# Altium PCB NaiS802HD_0.7.PcbDoc (part 1 of 2)
Units mm, origin at the board's own origin, x right, y up, seen from the top; angles counter-clockwise.
Board outline 60 x 38 mm, 4 copper layers (Top, INT1, GND, Bottom), stack 0.965 mm thick; 181 components, 228 nets, 826 pads, 387 vias.
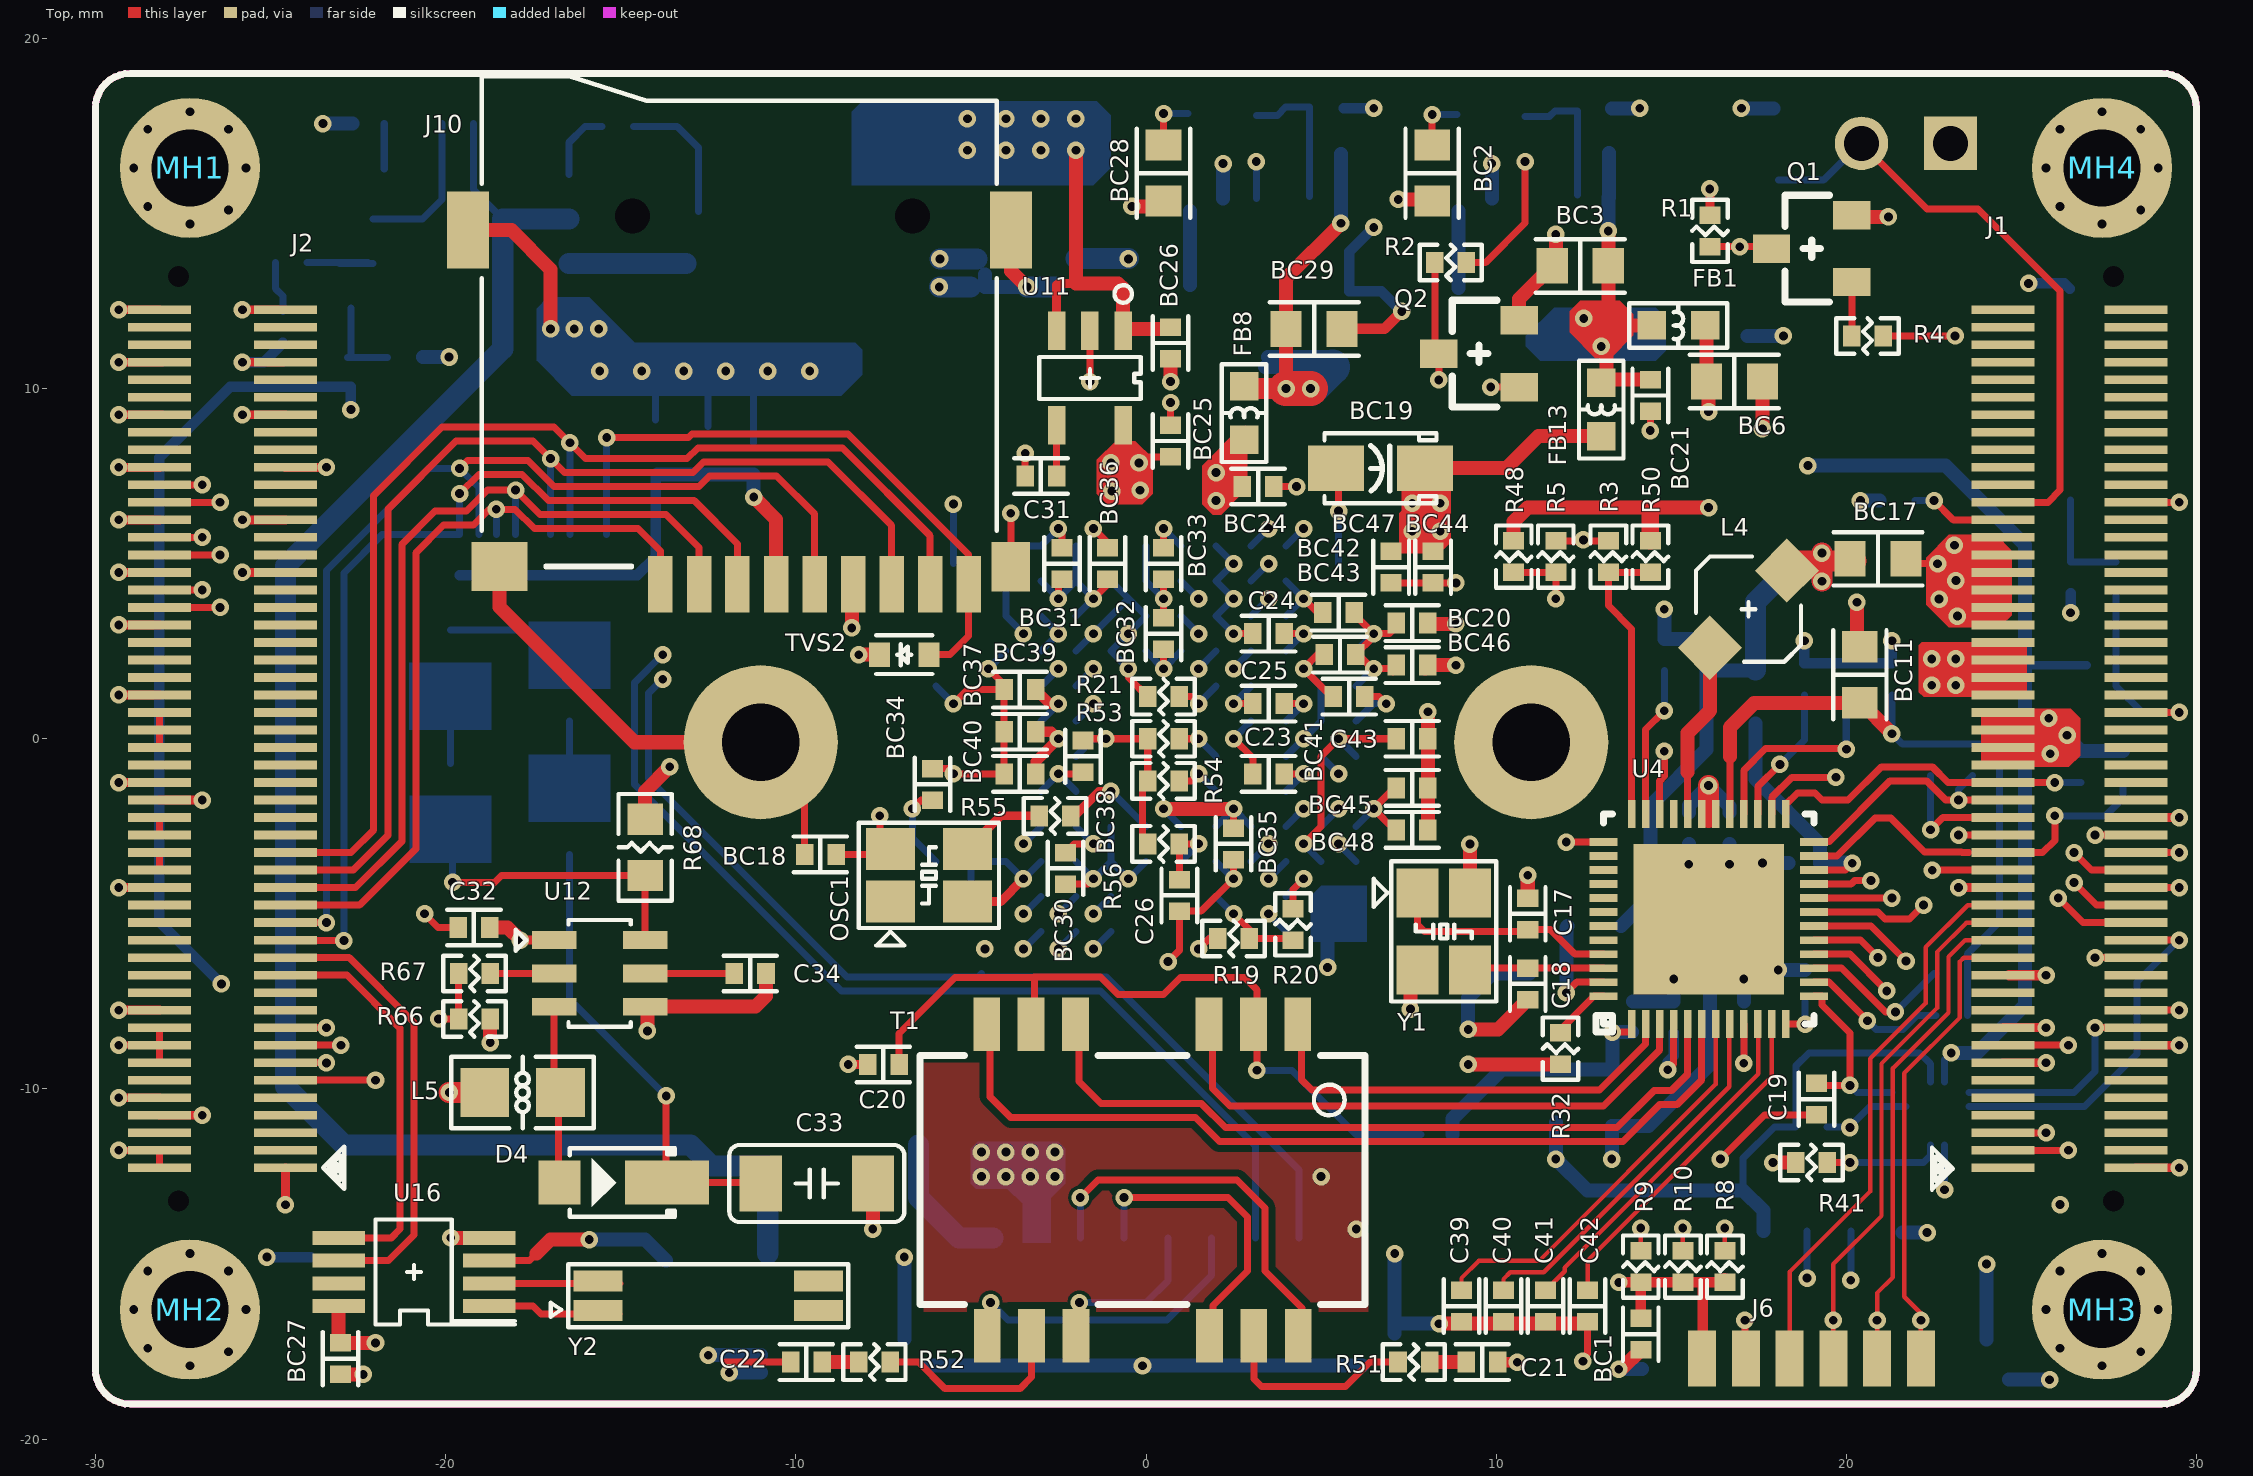
[diagram p0: Top view]
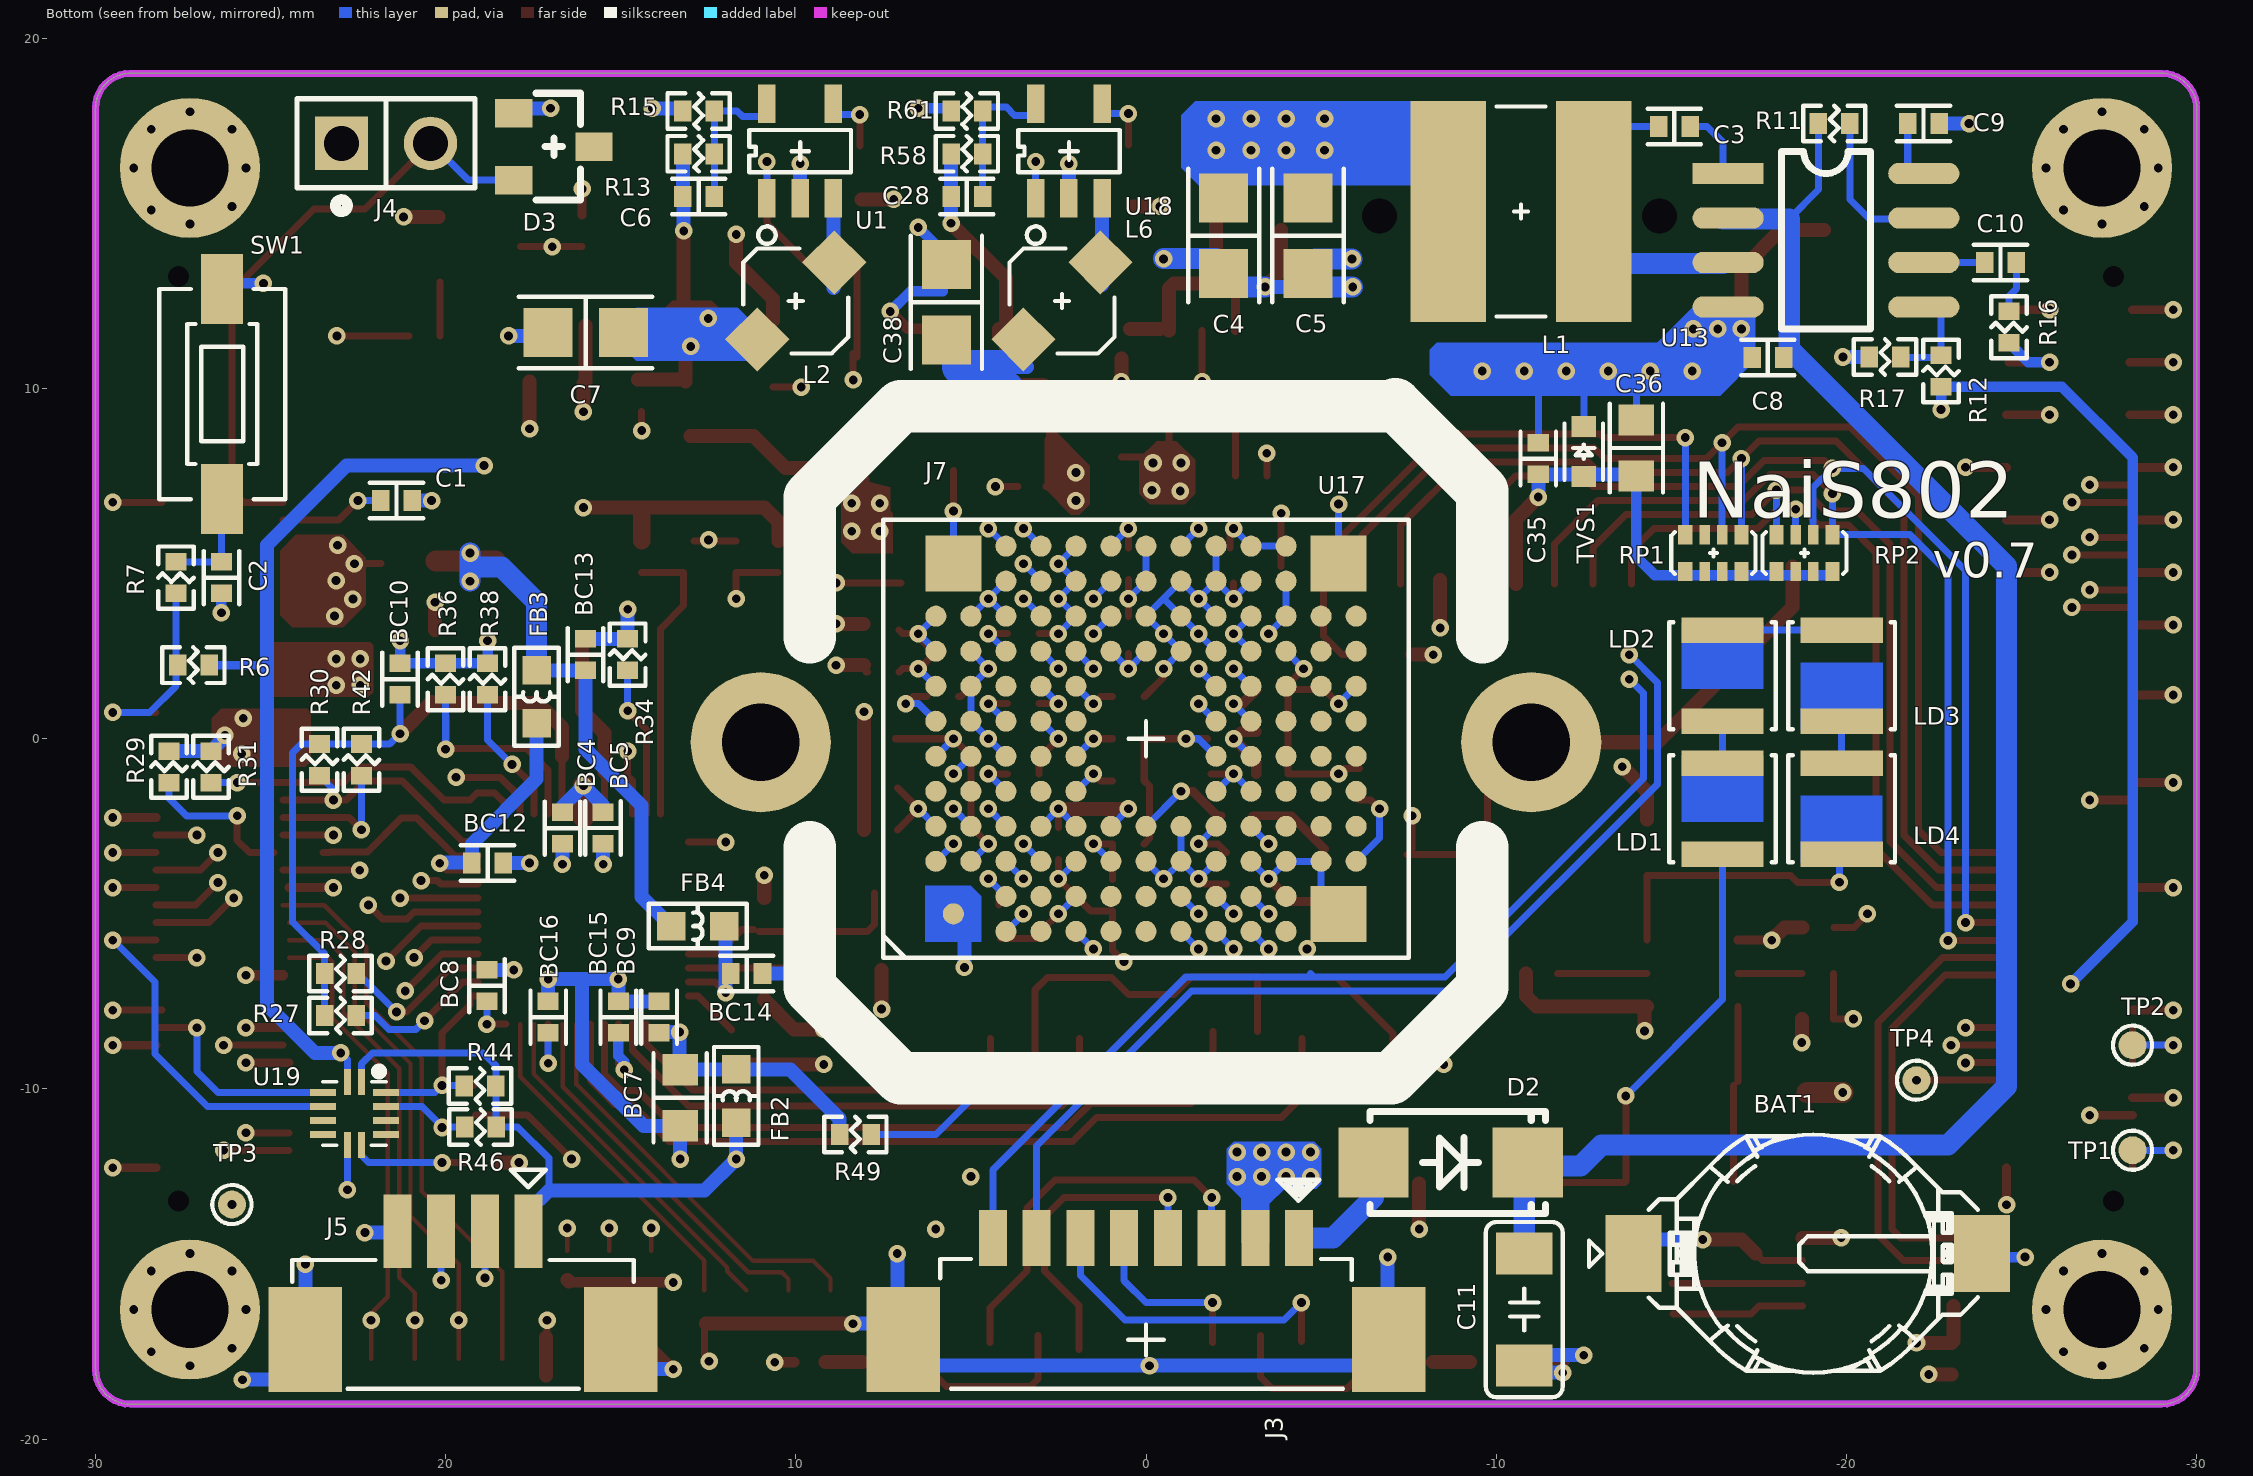
[diagram p1: Bottom view, seen from below]
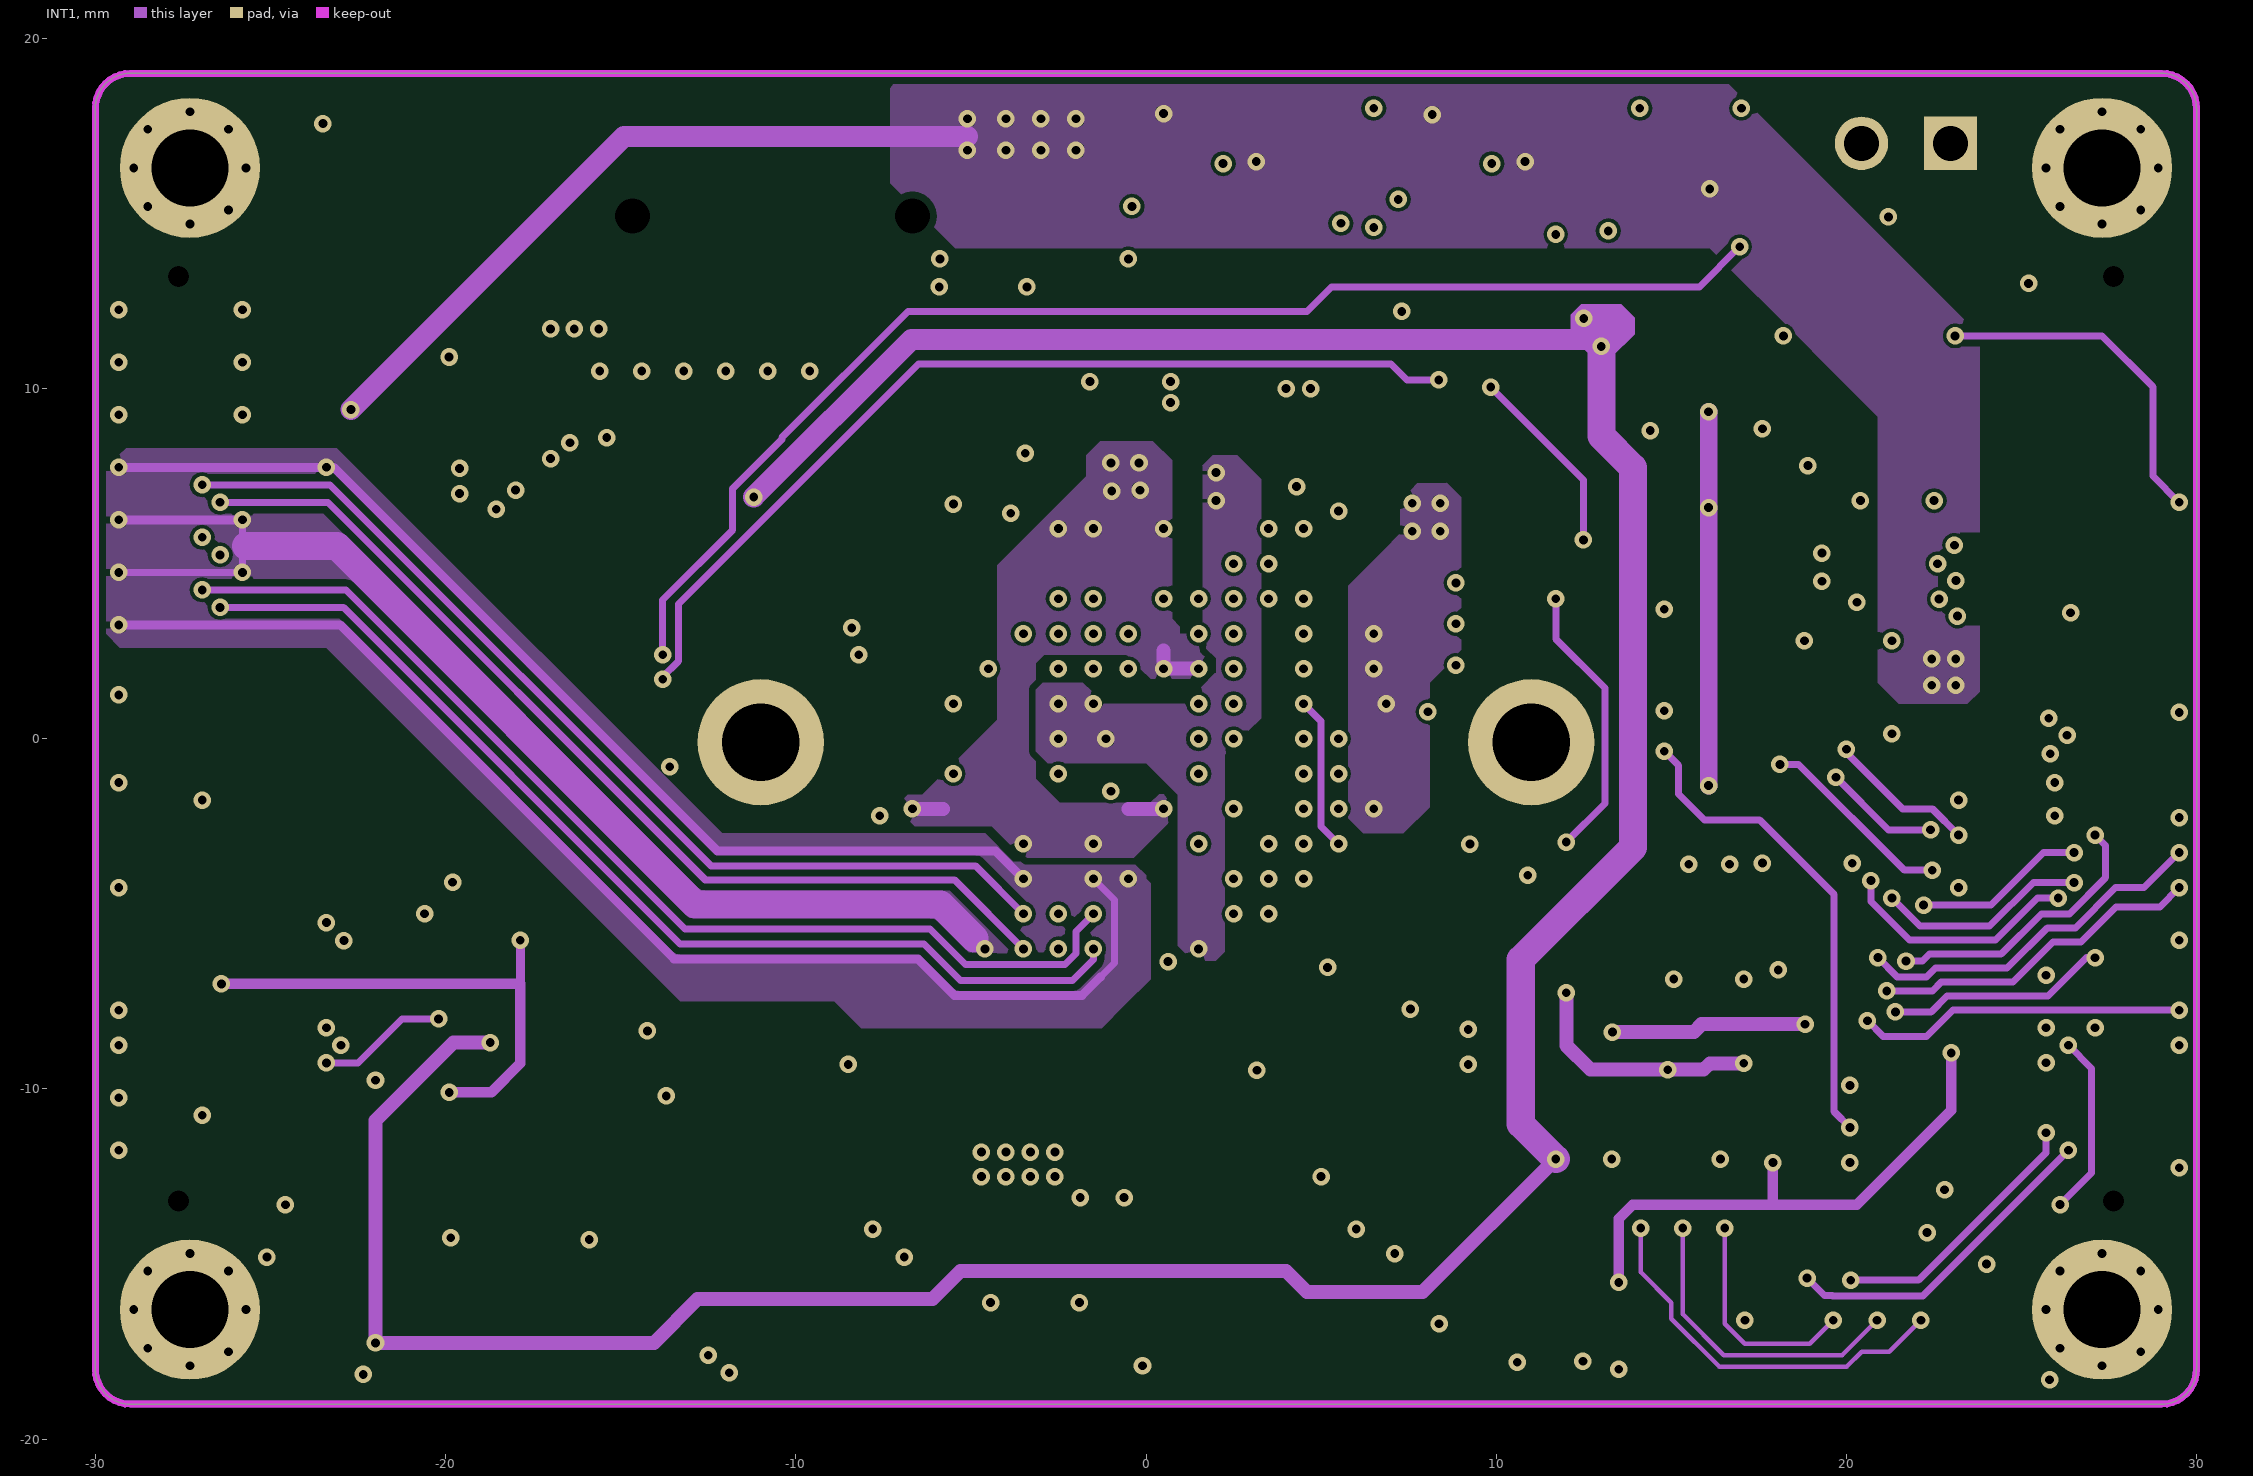
[diagram p2: INT1]
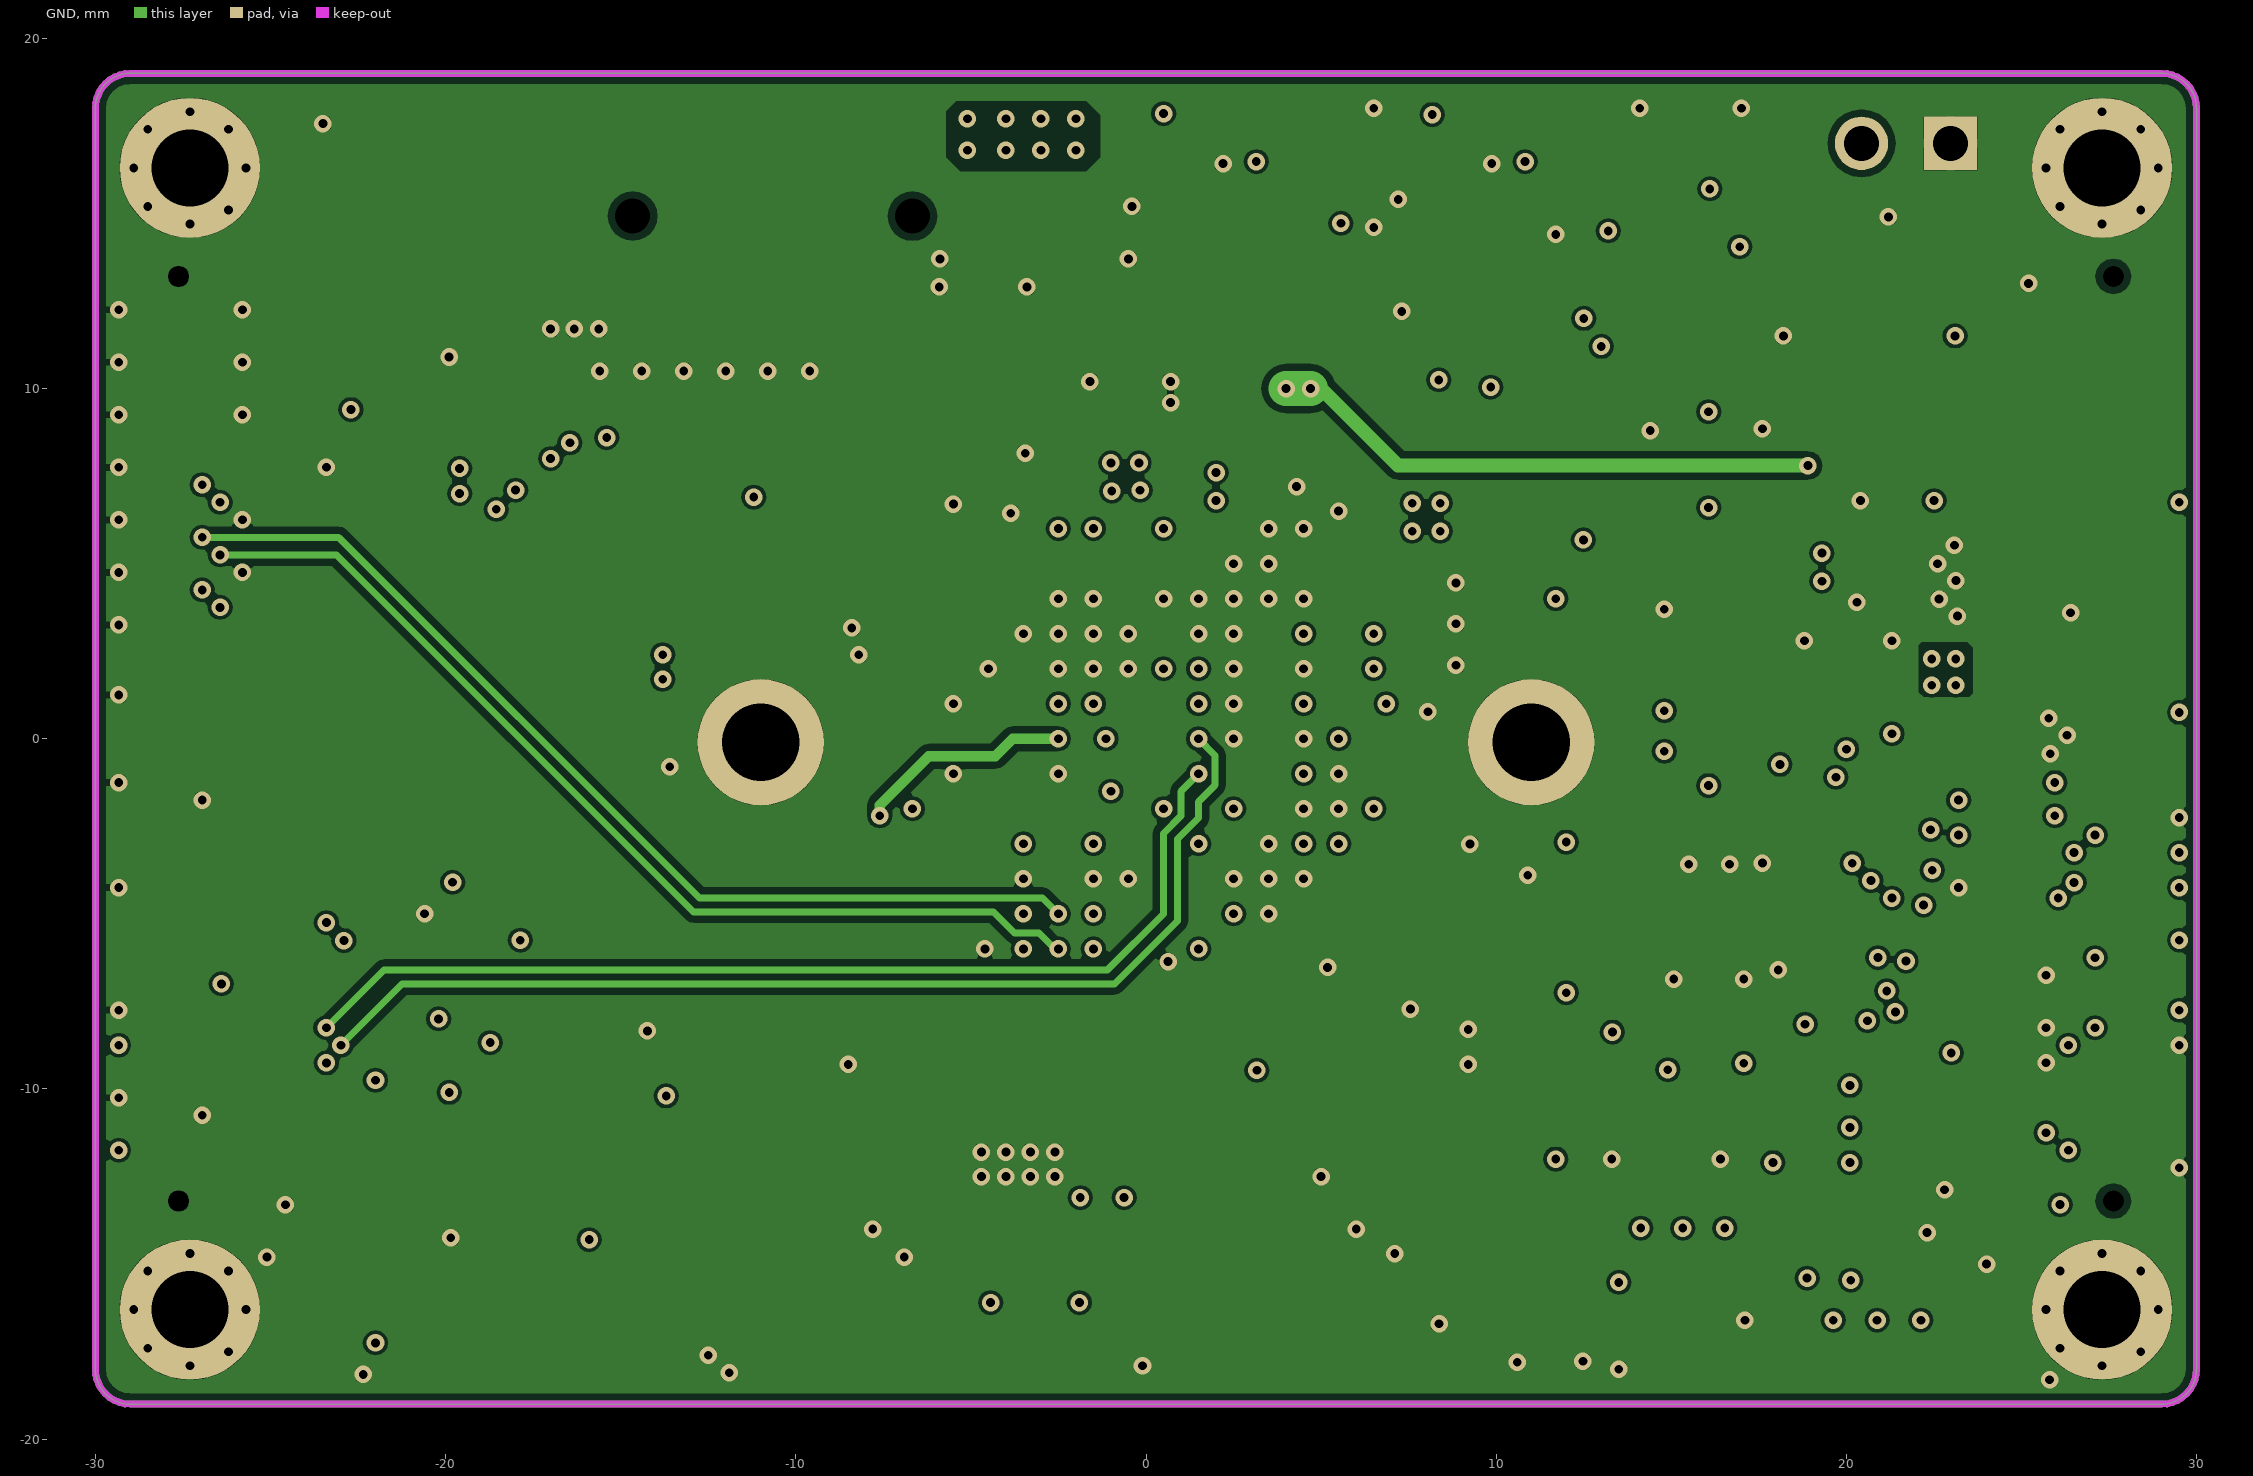
[diagram p3: GND]

## Layer stack, top to bottom
Solder Mask Top: solder mask 0.0102, Solder Resist, Dk 3.5
Top: signal copper 0.0343
Dielectric 1: dielectric 0.254, FR-4, Dk 4.3
INT1: signal copper 0.0343
Dielectric2: dielectric 0.254, FR-4, Dk 4.3
GND: signal copper 0.0343
Dielectric4: dielectric 0.32, FR-4, Dk 4.8
Bottom: signal copper 0.0343
Solder Mask Bottom: solder mask 0.0102, Solder Resist, Dk 3.5

## Board outline
-30,-18 -30,18 cw(c-29,18) -29,19 28.994,19 cw(c28.994,18) 29.994,18 30,18 30,-18 29.994,-18 cw(c28.994,-18) 28.994,-19 -29,-19 cw(c-29,-18)

## Design rules (kind name [scope] priority, off if disabled: settings)
AssemblyTestPointUsage [All] p1 off:
AssemblyTestpoint [All] p1 off: testpointundercomponent=TRUE minsize=1.016 maxsize=2.54 preferedsize=1.524 minholesize=0 maxholesize=1.016 preferedholesize=0.813 testpointgrid=0.025 usegrid=TRUE gridtolerance=0 allowsidetop=TRUE allowsidebottom=TRUE
Clearance Clearance_6 [InNet('+12V') or InNet('N21617464') or InNet('+5.0V')  or InNet('+3.3V') vs IsFill] p1: gap=0.4 ignorepadtopadclearanceinfootprint=FALSE except(0: Arc-Hole Track-Hole SMDPad-Hole THPad-Hole Via-Hole Fill-Hole Poly-Hole Region-Hole Text-Hole)
Clearance Clearance_4 [InComponent('MH1') OR InComponent('MH2') OR InComponent('MH3') OR InComponent('MH4') or INnet('GND') vs OnLayer('Keep-Out Layer')] p2: gap=0 ignorepadtopadclearanceinfootprint=FALSE
Clearance Clearance_3 [InComponent('U4') or InComponent('RP1') or InComponent('RP2') or  HasFootprint('CS-0603')] p3: gap=0.127 ignorepadtopadclearanceinfootprint=FALSE except(0: Arc-Hole Track-Hole SMDPad-Hole THPad-Hole Via-Hole Fill-Hole Poly-Hole Region-Hole Text-Hole)
Clearance Clearance_2 [OnLayer('Keep-Out Layer') vs InNet('GND')] p4: gap=0.1 ignorepadtopadclearanceinfootprint=FALSE except(0: Arc-Hole Track-Hole SMDPad-Hole THPad-Hole Via-Hole Fill-Hole Poly-Hole Region-Hole Text-Hole)
Clearance Clearance_1 [IsVia] p5: gap=0.1 ignorepadtopadclearanceinfootprint=FALSE except(0: Arc-Hole Track-Hole SMDPad-Hole THPad-Hole Via-Hole Fill-Hole Poly-Hole Region-Hole Text-Hole)
Clearance [All] p6: gap=0.2 ignorepadtopadclearanceinfootprint=FALSE except(0: Arc-Hole Track-Hole SMDPad-Hole THPad-Hole Via-Hole Fill-Hole Poly-Hole Region-Hole Text-Hole)
ComponentClearance ComponentClearance_1 [InComponent('J7') or InComponent('J5') or InComponent('J3') or InComponent('U18') or InComponent('U1') or Incomponent('J10') vs InComponent('U19') or InComponent('D2')  or InComponent('L6') or InComponent('L2') or InComponent('LD1') or InComponent('LD2') or InComponent('LD3') or InComponent('LD4') or InComponent('FB11') or InComponent('BC14') or InComponent('U17') or InComponent('OSC1') or InComponent('U11')  or  InComponent('U8') or InComponent('BC25') or InComponent('C24') or InComponent('C31') or InComponent('BC18') or InComponent('R55') or InComponent('C27') or InComponent('BC20') or InComponent('FB12') or InComponent('C25') or InComponent('C26') or InComponent('R56') or InComponent('R20') or InComponent('R19') or InComponent('R53') or InComponent('R54') or InComponent('R21') or InComponent('R18') or InComponent('FB4')  or Incomponent('C35') or Incomponent('TVS1') or InComponent('C36') or InComponent('FB2') or InComponent('BC7')] p1: gap=-10 collisioncheckmode=3 verticalgap=0.254 showdistances=FALSE
ComponentClearance [All] p2: gap=0.01 collisioncheckmode=3 verticalgap=0 showdistances=FALSE
DiffPairsRouting [All] p1 off: maxlimit=0.254 minlimit=0.2 mostfreqgap=0.254 toplayer_prefgap=0.2 toplayer_minwidth=0.2 toplayer_maxwidth=0.381 toplayer_prefwidth=0.254 midlayer1_mingap=0.254 midlayer1_minwidth=0.381 midlayer1_maxwidth=0.381 midlayer1_prefwidth=0.381 midlayer2_mingap=0.254 midlayer2_minwidth=0.381 midlayer2_maxwidth=0.381 midlayer2_prefwidth=0.381 bottomlayer_prefgap=0.2 bottomlayer_minwidth=0.2 bottomlayer_maxwidth=0.381 bottomlayer_prefwidth=0.254 maxuncoupledlength=12.7
FabricationTestPointUsage [All] p1 off: valid=0 allowmultiple=FALSE
FabricationTestpoint [All] p1 off: side=3 testpointundercomponent=TRUE minsize=1.016 maxsize=2.54 preferedsize=1.524 minholesize=0 maxholesize=1.016 preferedholesize=0.813 testpointgrid=0.025 allowsidetop=TRUE allowsidebottom=TRUE usegrid=TRUE gridtolerance=0
FanoutControl Fanout_BGA [IsBGA] p1 off: bgadir=Out bgaviamode=Centered fanoutstyle=Auto fanoutdirection=Alternating viagrid=0.025 // Fanout_BGA (Default Rule)
FanoutControl Fanout_SOIC [IsSOIC] p3 off: bgadir=Out bgaviamode=Centered fanoutstyle=Auto fanoutdirection=Alternating viagrid=0.025 // Fanout_SOIC (Default Rule)
FanoutControl Fanout_Small [(CompPinCount < 5)] p4 off: bgadir=Out bgaviamode=Centered fanoutstyle=Auto fanoutdirection=OutThenIn viagrid=0.025 // Fanout_Small (Default Rule)
FanoutControl Fanout_Default [All] p5 off: bgadir=Out bgaviamode=Centered fanoutstyle=Auto fanoutdirection=Alternating viagrid=0.025 // Fanout_Default (Default Rule)
Height [All] p1 off: minheight=0 maxheight=25.4 prefheight=12.7
HoleSize [All] p1: absolutevalues=TRUE maxlimit=5 minlimit=0.25 maxpercent=80.000 minpercent=20.000
HoleToHoleClearance [All] p1: gap=0.2 allowstackedmicrovias=TRUE
MinimumSolderMaskSliver [All] p1: minsoldermaskwidth=0
PasteMaskExpansion [All] p1 off: expansion=0
PermittedLayers [All] p1 off: toplayerpermitted=TRUE bottomlayerpermitted=TRUE
PlaneClearance [InNet('GND')] p1 off: clearance=0.508
PlaneConnect [All] p1 off: planeconnectstyle=Direct reliefexpansion=0.508 reliefentries=4 reliefconductorwidth=0.254 reliefairgap=0.254
PolygonConnect [All] p1 off: connectstyle=Direct reliefconductorwidth=0.254 reliefentries=4 polygonreliefangle="90 Angle" airgapwidth=0.1
RoutingVias [All] p1: holewidth=0.25 width=0.5 viastyle="Through Hole" minholewidth=0.25 minwidth=0.5 maxholewidth=0.25 maxwidth=0.5
ShortCircuit [All] p1 off: allowed=FALSE
SilkToSilkClearance [All] p1: silktosilkclearance=0
SilkToSolderMaskClearance [IsPad] p1: minsilkscreentomaskgap=0 clearancetoexposedcopper=TRUE
SolderMaskExpansion [All] p1: expansion=0.102
Width Width_1 [(InNet('VDD_3.3V') OR InNet('AVDD') OR InNet('OVDD') OR InNet('DVDD'))] p1: maxlimit=2 minlimit=0.2 preferedwidth=2
Width [All] p2: maxlimit=1 minlimit=0.1 preferedwidth=0.2
10 further rules are at their usual default settings.

## Components (designator, comment, footprint, x,y, rotation, side; value= is the part's Value field where it differs from the comment)
BAT1 "CN048S-0005//SMD_BAT_HOLDER" BAT-CN048S -18.9,-14.7 r90 bottom
BC1 "0.1uF" CS-1005 14.127,-17 r270 top
BC2 "0.1uF" CS-1608 8.173,16.15 r90 top
BC3 "1uF" CS-1608 12.4,13.5 r0 top
BC4 "0.1uF" CS-1005 16.663,-2.553 r270 bottom
BC5 "0.1uF" CS-1005 15.5,-2.549 r270 bottom
BC6 "10uF" CS-1608 16.8,10.2 r0 top
BC7 "10uF" CS-1608 13.3,-10.25 r270 bottom
BC8 "0.1uF" CS-1005 18.818,-7.049 r90 bottom
BC9 "0.1uF" CS-1005 13.9,-7.949 r90 bottom
BC10 "0.1uF" CS-1005 21.3,1.7 r90 bottom
BC11 "10uF" CS-1608 20.381,1.827 r90 top
BC12 "0.1uF" CS-1005 18.8,-3.549 r180 bottom
BC13 "0.1uF" CS-1005 16,2.4 r90 bottom
BC14 "0.1uF" CS-1005 11.4,-6.7 r180 bottom
BC15 "0.1uF" CS-1005 15.068,-7.949 r90 bottom
BC16 "0.1uF" CS-1005 17.068,-7.949 r90 bottom
BC17 "10uF" CS-1608 20.9,5.137 r0 top
BC18 "1uF" CS-1005 -9.3,-3.3 r0 top
BC19 "22uF" CTS-3216 6.696,7.727 r180 top
BC20 "1uF" CS-1005 7.6,3.3 r180 top
BC21 "0.1uF" CS-1005 14.4,9.8 r90 top
BC24 "1uF" CS-1005 3.2,7.2 r180 top
BC25 "1uF" CS-1005 0.7,8.5 r270 top
BC26 "0.1uF" CS-1005 0.7,11.3 r90 top
BC27 "0.1uF" CS-1005 -23,-17.7 r90 top
BC28 "0.1uF" CS-1608 0.5,16.15 r90 top
BC29 "1uF" CS-1608 4.8,11.7 r180 top
BC30 "1uF" CS-1005 -2.3,-3.7 r90 top
BC31 "1uF" CS-1005 -2.4,5 r90 top
BC32 "1uF" CS-1005 0.5,3 r270 top
BC33 "1uF" CS-1005 0.5,5 r90 top
BC34 "1uF" CS-1005 -6.1,-1.3 r270 top
BC35 "1uF" CS-1005 2.5,-3 r90 top
BC36 "1uF" CS-1005 -1.1,5 r90 top
BC37 "1uF" CS-1005 -3.6,0.2 r0 top
BC38 "1uF" CS-1005 -1.8,-0.5 r90 top
BC39 "1uF" CS-1005 -3.6,1.4 r0 top
BC40 "1uF" CS-1005 -3.6,-1 r0 top
BC41 "1uF" CS-1005 5.8,1.2 r0 top
BC42 "0.1uF" CS-1005 5.5,3.6 r0 top
BC43 "10uF" CS-1005 5.538,2.4 r0 top
BC44 "0.1uF" CS-1005 8.2,4.9 r90 top
BC45 "10uF" CS-1005 7.6,-1.4 r180 top
BC46 "0.1uF" CS-1005 7.6,2.1 r180 top
BC47 "10uF" CS-1005 7,4.9 r90 top
BC48 "0.1uF" CS-1005 7.6,-2.6 r180 top
C1 "0.1uF" CS-1005 21.4,6.8 r0 bottom
C2 "1nF/NI" CS-1005 26.4,4.6 r270 bottom
C3 "10nF" CS-1005 -15.085,17.485 r0 bottom
C4 "22uF-6.3V" CS-2012 -2.219,14.365 r270 bottom
C5 "22uF-6.3V" CS-2012 -4.625,14.365 r270 bottom
C6 "22pF" CS-1005 12.773,15.483 r180 bottom
C7 "22uF-6.3V" CS-2012 16,11.6 r0 bottom
C8 "0.1uF" CS-1005 -17.756,10.889 r0 bottom
C9 "0.1uF" CS-1005 -22.2,17.564 r180 bottom
C10 "3.3nF" CS-1005 -24.4,13.6 r180 bottom
C11 "4.7uF-25V-3216" C3216 -10.8,-16.3 r270 bottom (schematic designator c11)
C17 "12pF" CS-1005 10.9,-5 r270 top
C18 "12pF" CS-1005 10.9,-7 r90 top
C19 "0.1uF" CS-1005 19.143,-10.292 r270 top
C20 "0.1uF" CS-1005 -7.5,-9.3 r180 top
C21 "0.1uF" CS-1005 9.6,-17.8 r0 top
C22 "0.1uF" CS-1005 -9.7,-17.8 r180 top
C23 "1uF" CS-1005 3.5,-1 r0 top
C24 "220nF" CS-1005 3.5,3 r0 top
C25 "1uF" CS-1005 3.5,1 r0 top
C26 "0.1uF" CS-1005 0.95,-4.473 r270 top
C28 "22pF" CS-1005 5.116,15.483 r180 bottom
C31 "10nF" CS-1005 -3,7.5 r0 top
C32 "1uF" CS-1005 -19.19,-5.387 r180 top
C33 "4.7uF-25V-3216" C3216 -9.4,-12.7 r0 top
C34 "220nF" CS-1005 -11.3,-6.7 r180 top
C35 "0.1uF" CS-1005 -11.2,8 r90 bottom
C36 "22uF" CS-1608 -14,8.3 r90 bottom
C38 "22uF-6.3V" CS-2012 5.7,12.462 r90 bottom
C39 "0.1uF" CS-1005 9.008,-16.2 r270 top
C40 "0.1uF" CS-1005 10.208,-16.2 r270 top
C41 "0.1uF" CS-1005 11.408,-16.2 r270 top
C42 "0.1uF" CS-1005 12.608,-16.2 r270 top
C43 "1uF" CS-1005 7.6,0 r180 top
D2 "RB051L-40" SOD-106 -8.7,-12.1 r180 bottom
D3 "BAT54A" SOT-23 16.9,16.9 r180 bottom
D4 "DFLS140" PowerDI123 -14.9,-12.672 r180 top
FB1 "220R" LS-1608 15.2,11.8 r0 top
FB2 "220R" LS-1608 11.7,-10.2 r90 bottom
FB3 "220R" LS-1608 17.4,1.2 r270 bottom
FB4 "220R" LS-1608 12.8,-5.349 r180 bottom
FB8 "220R" LS-1608 2.8,9.3 r90 top
FB13 "220R" LS-1608 13,9.4 r270 top
J1 "LB222-G100S-BOR" BTB2X50-050-F-SMD 26.37,0 r180 top locked
J2 "LB208-G100P-BOR" BTB2X50-050-M-SMD -26.37,0 r180 top locked
J3 "12505WR-08" 12505WR-8P 0,-15.708 r180 bottom
J4 "PH-2PSM//NI" PH-2PSM 21.7,17 r90 bottom
J5 "12505WR-4P" 12505WS-4P 19.5,-15.608 r180 bottom
J6 "6pin 2.54mm//NI" TP_HEADER_6 19,-17.7 r0 top
J7 "Lens Holder" LENS_HOLDER_B_SMALL 0,-0.1 r0 bottom locked
J10 "112J-TXAR-R" CON_U-SD -13.866,4.412 r0 top locked
L1 "CDRH5D18NP-100NC-10uH" CDRH5D18NP -10.708,15.055 r180 bottom
L2 "CDRH2D14NP-2R2NC" CDRH2D14NP 10,12.5 r180 bottom
L4 "CDRH2D14NP-2R2NC" CDRH2D14NP 17.2,3.7 r0 top
L5 "10uH" LS-2012 -17.8,-10.1 r180 top
L6 "CDRH2D14NP-2R2NC" CDRH2D14NP 2.4,12.5 r180 bottom
LD1 "LED3030" LED-3030 -16.461,-2 r90 bottom
LD2 "LED3030" LED-3030 -16.461,1.8 r90 bottom
LD3 "LED3030" LED-3030 -19.861,1.8 r270 bottom
LD4 "LED3030" LED-3030 -19.861,-2 r270 bottom
MH1 "4.04pi" VA-2.2 -27.3,16.3 r0 top locked
MH2 "4.04pi" VA-2.2 -27.3,-16.3 r0 top locked
MH3 "4.04pi" VA-2.2 27.3,-16.3 r0 top locked
MH4 "4.04pi" VA-2.2 27.3,16.3 r0 top locked
OSC1 "24Mhz-SX32-1.8V" SX-32 -6.2,-3.9 r180 top
Q1 "MMBT6427" SOT-23 19,14 r180 top
Q2 "MMBT6427" SOT-23 9.5,11 r180 top
R1 "2.2K" RS-1005 16.1,14.5 r90 top
R2 "2.2K" RS-1005 8.7,13.6 r0 top
R3 "10K" RS-1005 13.2,5.2 r270 top
R4 "10K" RS-1005 20.6,11.5 r0 top
R5 "10K" RS-1005 11.7,5.2 r270 top
R6 "10K" RS-1005 27.2,2.1 r180 bottom
R7 "0" RS-1005 27.7,4.6 r90 bottom
R8 "4.7K" RS-1005 16.527,-15.073 r270 top
R9 "4.7K" RS-1005 14.127,-15.073 r270 top
R10 "4.7K" RS-1005 15.327,-15.073 r270 top
R11 "100K" RS-1005 -19.65,17.564 r180 bottom
R12 "45K, 1%" RS-1005 -22.7,10.5 r90 bottom
R13 "150K, 1%" RS-1005 12.773,16.703 r0 bottom
R15 "33.3K, 1%" RS-1005 12.773,17.923 r180 bottom
R16 "2.2K" RS-1005 -24.645,11.75 r90 bottom
R17 "10K, 1%" RS-1005 -21.1,10.9 r180 bottom
R19 "10K" RS-1005 2.5,-5.7 r0 top
R20 "0//NI" RS-1005 4.2,-5.3 r270 top
R21 "0" RS-1005 0.5,1.2 r0 top
R27 "4.7K" RS-1005 23,-7.9 r180 bottom
R28 "4.7K" RS-1005 23,-6.7 r180 bottom
R29 "4.7K" RS-1005 27.9,-0.8 r270 bottom
R30 "4.7K" RS-1005 23.6,-0.6 r270 bottom
R31 "4.7K" RS-1005 26.7,-0.8 r270 bottom
R32 "2.49K, 1%" RS-1005 11.836,-8.849 r90 top
R34 "4.7K" RS-1005 14.8,2.4 r270 bottom
R36 "4.7K" RS-1005 20,1.7 r270 bottom
R38 "4.7K" RS-1005 18.8,1.7 r270 bottom
R41 "2.2K" RS-1005 19,-12.1 r180 top
R42 "4.7K" RS-1005 22.4,-0.6 r90 bottom
R44 "40.2K" RS-1005 19.016,-9.911 r0 bottom
R46 "10K" RS-1005 19,-11.084 r180 bottom
R48 "4.7K" RS-1005 10.5,5.2 r270 top
R49 "0//NI" RS-1005 8.3,-11.3 r180 bottom
R50 "4.7K" RS-1005 14.4,5.2 r90 top
R51 "75" RS-1005 7.645,-17.8 r180 top
R52 "75" RS-1005 -7.755,-17.8 r0 top
R53 "4.7K" RS-1005 0.5,0 r0 top
R54 "4.7K" RS-1005 0.5,-1.2 r0 top
R55 "22" RS-1005 -2.6,-2.2 r0 top
R56 "10K" RS-1005 0.5,-3 r180 top
R58 "150K, 1%" RS-1005 5.116,16.703 r0 bottom
R61 "75K,1%" RS-1005 5.116,17.923 r180 bottom
R66 "10K" RS-1005 -19.175,-8 r0 top
R67 "22" RS-1005 -19.175,-6.7 r180 top
R68 "1, 1%" RS-1608 -14.3,-3.1 r90 top
RP1 "10K" RP-4_1005 -16.2,5.3 r180 bottom
RP2 "10K" RP-4_1005 -18.8,5.3 r180 bottom
SW1 "SW PB" SWS-CTT-1131U 26.378,9.843 r90 bottom
T1 "TRC41604NL" TRC41604NL -0.1,-12.6 r180 top
TP1 "TPS" TP_0.8_SMD -28.17,-11.75 r90 bottom
TP2 "TPS" TP_0.8_SMD -28.17,-8.75 r90 bottom
TP3 "TPS" TP_0.8_SMD 26.1,-13.3 r90 bottom
TP4 "TPS" TP_0.8_SMD -22,-9.75 r90 bottom
TVS1 "ESD5B5.0ST1G" SOD-523 -12.5,8.2 r270 bottom
TVS2 "ESD5B5.0ST1G" SOD-523 -6.9,2.4 r0 top
U1 "AME5253-AEVADJ" SOT-23-5P 9.873,16.78 r180 bottom
U4 "YT8521SH" QFN48_6x6 16.068,-5.149 r90 top
U11 "SGM2036-1.2YN5G/TR" SOT-23-5P -1.6,10.3 r180 top
U12 "TPS61165DBVR" SOT23-6 -15.6,-6.7 r90 top
U13 "MP1482" SOIC-8 -19.4,14.2 r270 bottom
U16 "DS1339U-33" TSSOP8-M -20.9,-15.225 r90 top
U17 "IMX385LQR-C" LGA-128_SONY 0,0 r90 bottom locked
U18 "AME5253-AEVADJ" SOT-23-5P 2.2,16.78 r180 bottom
U19 "SGM4574YUQN12G/TR" UTQFN-1.8】1.8-12L 22.6,-10.7 r270 bottom
Y1 "25MHz-S20P-SX32" SX-32 8.5,-5.5 r90 top
Y2 "32.768KHz-MC-146-7pF" XTS-MC-146 -12.5,-15.9 r0 top

## Footprints (in the part's own frame and the unit in brackets; to place one, negate y for a bottom-side part, rotate by r counter-clockwise, add the part's x,y. Pads: shape width x height; smd on the part's side, far side on the other; paste and mask are expansions set on the pad)
12505WR-8P [mm]
  rect 0.8x1.6 smd: 1(4.375,1.45) 2(3.125,1.45) 3(1.875,1.45) 4(0.625,1.45) 5(-0.625,1.45) 6(-1.875,1.45) 7(-3.125,1.45) 8(-4.375,1.45)
  rect 2.1x3 smd: 9(-6.925,-1.45) 10(6.925,-1.45)
  silkscreen extent -5.87,-2.85 5.87,3.12
12505WS-4P [mm]
  rect 0.8x2.1 smd: 1(1.875,1.55) 2(0.625,1.55) 3(-0.625,1.55) 4(-1.875,1.55)
  rect 2.1x3 smd: 5(-4.5,-1.55) 6(4.5,-1.55)
  silkscreen extent -4.87,-2.95 4.87,3.3
BAT-CN048S [mm]
  rect 2.2x1.6 smd: 1(0,4.975) 2(0,-4.975)
  silkscreen extent -3.4,-4.85 3.4,6.25, body extent -3.39,-5.22 3.31,5.18, height 2.8
BTB2X50-050-F-SMD [mm]
  rect 1.8x0.25 smd: 1(1.9,12.25) 2(-1.9,12.25) 3(1.9,11.75) 4(-1.9,11.75) 5(1.9,11.25) 6(-1.9,11.25) 7(1.9,10.75) 8(-1.9,10.75) 9(1.9,10.25) 10(-1.9,10.25) 11(1.9,9.75) 12(-1.9,9.75) 13(1.9,9.25) 14(-1.9,9.25) 15(1.9,8.75) 16(-1.9,8.75) 17(1.9,8.25) 18(-1.9,8.25) 19(1.9,7.75) 20(-1.9,7.75) 21(1.9,7.25) 22(-1.9,7.25) 23(1.9,6.75) 24(-1.9,6.75) 25(1.9,6.25) 26(-1.9,6.25) 27(1.9,5.75) 28(-1.9,5.75) 29(1.9,5.25) 30(-1.9,5.25) 31(1.9,4.75) 32(-1.9,4.75) 33(1.9,4.25) 34(-1.9,4.25) 35(1.9,3.75) 36(-1.9,3.75) 37(1.9,3.25) 38(-1.9,3.25) 39(1.9,2.75) 40(-1.9,2.75) 41(1.9,2.25) 42(-1.9,2.25) 43(1.9,1.75) 44(-1.9,1.75) 45(1.9,1.25) 46(-1.9,1.25) 47(1.9,0.75) 48(-1.9,0.75) 49(1.9,0.25) 50(-1.9,0.25) 51(1.9,-0.25) 52(-1.9,-0.25) 53(1.9,-0.75) 54(-1.9,-0.75) 55(1.9,-1.25) 56(-1.9,-1.25) 57(1.9,-1.75) 58(-1.9,-1.75) 59(1.9,-2.25) 60(-1.9,-2.25) 61(1.9,-2.75) 62(-1.9,-2.75) 63(1.9,-3.25) 64(-1.9,-3.25) 65(1.9,-3.75) 66(-1.9,-3.75) 67(1.9,-4.25) 68(-1.9,-4.25) 69(1.9,-4.75) 70(-1.9,-4.75) 71(1.9,-5.25) 72(-1.9,-5.25) 73(1.9,-5.75) 74(-1.9,-5.75) 75(1.9,-6.25) 76(-1.9,-6.25) 77(1.9,-6.75) 78(-1.9,-6.75) 79(1.9,-7.25) 80(-1.9,-7.25) 81(1.9,-7.75) 82(-1.9,-7.75) 83(1.9,-8.25) 84(-1.9,-8.25) 85(1.9,-8.75) 86(-1.9,-8.75) 87(1.9,-9.25) 88(-1.9,-9.25) 89(1.9,-9.75) 90(-1.9,-9.75) 91(1.9,-10.25) 92(-1.9,-10.25) 93(1.9,-10.75) 94(-1.9,-10.75) 95(1.9,-11.25) 96(-1.9,-11.25) 97(1.9,-11.75) 98(-1.9,-11.75) 99(1.9,-12.25) 100(-1.9,-12.25)
  round 0.5 hole 0.6: M1(-1.25,-13.2) M2(-1.25,13.2)
  silkscreen extent 3.32,11.67 3.92,12.87
BTB2X50-050-M-SMD [mm]
  rect 1.8x0.25 smd: 1(-1.8,12.25) 2(1.8,12.25) 3(-1.8,11.75) 4(1.8,11.75) 5(-1.8,11.25) 6(1.8,11.25) 7(-1.8,10.75) 8(1.8,10.75) 9(-1.8,10.25) 10(1.8,10.25) 11(-1.8,9.75) 12(1.8,9.75) 13(-1.8,9.25) 14(1.8,9.25) 15(-1.8,8.75) 16(1.8,8.75) 17(-1.8,8.25) 18(1.8,8.25) 19(-1.8,7.75) 20(1.8,7.75) 21(-1.8,7.25) 22(1.8,7.25) 23(-1.8,6.75) 24(1.8,6.75) 25(-1.8,6.25) 26(1.8,6.25) 27(-1.8,5.75) 28(1.8,5.75) 29(-1.8,5.25) 30(1.8,5.25) 31(-1.8,4.75) 32(1.8,4.75) 33(-1.8,4.25) 34(1.8,4.25) 35(-1.8,3.75) 36(1.8,3.75) 37(-1.8,3.25) 38(1.8,3.25) 39(-1.8,2.75) 40(1.8,2.75) 41(-1.8,2.25) 42(1.8,2.25) 43(-1.8,1.75) 44(1.8,1.75) 45(-1.8,1.25) 46(1.8,1.25) 47(-1.8,0.75) 48(1.8,0.75) 49(-1.8,0.25) 50(1.8,0.25) 51(-1.8,-0.25) 52(1.8,-0.25) 53(-1.8,-0.75) 54(1.8,-0.75) 55(-1.8,-1.25) 56(1.8,-1.25) 57(-1.8,-1.75) 58(1.8,-1.75) 59(-1.8,-2.25) 60(1.8,-2.25) 61(-1.8,-2.75) 62(1.8,-2.75) 63(-1.8,-3.25) 64(1.8,-3.25) 65(-1.8,-3.75) 66(1.8,-3.75) 67(-1.8,-4.25) 68(1.8,-4.25) 69(-1.8,-4.75) 70(1.8,-4.75) 71(-1.8,-5.25) 72(1.8,-5.25) 73(-1.8,-5.75) 74(1.8,-5.75) 75(-1.8,-6.25) 76(1.8,-6.25) 77(-1.8,-6.75) 78(1.8,-6.75) 79(-1.8,-7.25) 80(1.8,-7.25) 81(-1.8,-7.75) 82(1.8,-7.75) 83(-1.8,-8.25) 84(1.8,-8.25) 85(-1.8,-8.75) 86(1.8,-8.75) 87(-1.8,-9.25) 88(1.8,-9.25) 89(-1.8,-9.75) 90(1.8,-9.75) 91(-1.8,-10.25) 92(1.8,-10.25) 93(-1.8,-10.75) 94(1.8,-10.75) 95(-1.8,-11.25) 96(1.8,-11.25) 97(-1.8,-11.75) 98(1.8,-11.75) 99(-1.8,-12.25) 100(1.8,-12.25)
  round 0.5 hole 0.6: 1(1.25,13.2) 1(1.25,-13.2)
  silkscreen extent -3.47,11.65 -2.88,12.85
C3216 [mm]
  rect 1.2x1.6 smd: 1(-1.6,0) 2(1.6,0)
  silkscreen extent -2.5,-1.1 2.5,1.1
CDRH2D14NP [mm]
  rect 1.3x1.3 smd rot 45: 1(1.1,1.1) 2(-1.1,-1.1)
  Top pour cut-out: -1.484,1.116 -1.504,-0.621 -0.625,-1.5 1.025,-1.5 1.5,-1.025 1.5,0.7 0.7,1.5 -1.1,1.5
  silkscreen extent -1.5,-1.5 1.5,1.5
CDRH5D18NP [mm]
  rect 2.15x6.3 smd: 1(2.075,0) 2(-2.075,0)
  silkscreen extent -0.7,-3 0.7,3
CON_U-SD [mm]
  rect 0.7x1.6 smd: 1(0,0) 2(1.105,0) 3(2.201,0) 4(3.303,0) 5(4.407,0) 6(5.504,0) 7(6.6,0) 8(7.705,0) CD(8.801,0)
  rect 1.1x1.4 smd: 9(10.006,0.499)
  rect 1.6x1.4 smd: 10(-4.596,0.508)
  rect 1.2x2.2 smd: 11(10.012,10.108) 12(-5.497,10.108)
  round 0 hole 1: 13(7.198,10.509)
  round 0.3 hole 1: 14(-0.79,10.513)
  silkscreen extent -5.1,0.48 9.6,14.51
CS-1005 [mm]
  rect 0.5x0.6 smd: 1(-0.45,0) 2(0.45,0)
  silkscreen extent -0.76,-0.51 0.76,0.51
CS-1608 [mil]
  rect 35x40 smd: 1(-31.5,0) 2(31.5,0)
  silkscreen extent -50,-30 50,30
CS-2012 [mil]
  rect 55x55 smd: 1(-42.5,0) 2(42.5,0)
  silkscreen extent -75,-40 75,40
CTS-3216 [mil]
  rect 63x51 smd: 1(-50,0) 2(50,0)
  silkscreen extent -63,-39 63,39
LED-3030 [mm]
  rect 0.725x2.35 smd: 1(-1.3,0) 2(1.3,0)
  Top region: -0.375,1.175 1.55,1.175 1.55,-1.175 -0.375,-1.175
  silkscreen extent -1.53,-1.53 1.53,1.53
LENS_HOLDER_B_SMALL [mm]
  round 4 / inner round 3.6 / far side round 4.4 hole 2.2: 1(-11,0) 2(11,0)
  silkscreen extent -9.6,-9.65 9.6,9.6
LGA-128_SONY [mm]
  round 0.6 smd paste+0 mask+0: A1(-5,5.5)
  round 0.6 smd: A3(-3.5,6) A4(-2.5,6) A5(-1.5,6) A6(-0.5,6) A7(0.5,6) A8(1.5,6) A9(2.5,6) A10(3.5,6) B3(-3.5,5) B4(-2.5,5) B5(-1.5,5) B6(-0.5,5) B7(0.5,5) B8(1.5,5) B9(2.5,5) B10(3.5,5) C1(-5.5,4) C2(-4.5,4) C3(-3.5,4) C4(-2.5,4) C5(-1.5,4) C6(-0.5,4) C7(0.5,4) C8(1.5,4) C9(2.5,4) C10(3.5,4) C11(4.5,4) C12(5.5,4) D1(-5.5,3) D2(-4.5,3) D3(-3.5,3) D4(-2.5,3) D5(-1.5,3) D6(-0.5,3) D7(0.5,3) D8(1.5,3) D9(2.5,3) D10(3.5,3) D11(4.5,3) D12(5.5,3) E1(-5.5,2) E2(-4.5,2) E3(-3.5,2) E4(-2.5,2) E5(-1.5,2) E6(-0.5,2) E7(0.5,2) E8(1.5,2) E9(2.5,2) E10(3.5,2) E11(4.5,2) E12(5.5,2) F1(-5.5,1) F2(-4.5,1) F3(-3.5,1) F4(-2.5,1) F9(2.5,1) F10(3.5,1) F11(4.5,1) F12(5.5,1) G1(-5.5,0) G2(-4.5,0) G3(-3.5,0) G4(-2.5,0) G9(2.5,0) G10(3.5,0) G11(4.5,0) G12(5.5,0) H1(-5.5,-1) H2(-4.5,-1) H3(-3.5,-1) H4(-2.5,-1) H9(2.5,-1) H10(3.5,-1) H11(4.5,-1) H12(5.5,-1) J1(-5.5,-2) J2(-4.5,-2) J3(-3.5,-2) J4(-2.5,-2) J5(-1.5,-2) J6(-0.5,-2) J7(0.5,-2) J8(1.5,-2) J9(2.5,-2) J10(3.5,-2) J11(4.5,-2) J12(5.5,-2) K1(-5.5,-3) K2(-4.5,-3) K3(-3.5,-3) K4(-2.5,-3) K5(-1.5,-3) K6(-0.5,-3) K7(0.5,-3) K8(1.5,-3) K9(2.5,-3) K10(3.5,-3) K11(4.5,-3) K12(5.5,-3) L1(-5.5,-4) L2(-4.5,-4) L3(-3.5,-4) L4(-2.5,-4) L5(-1.5,-4) L6(-0.5,-4) L7(0.5,-4) L8(1.5,-4) L9(2.5,-4) L10(3.5,-4) L11(4.5,-4) L12(5.5,-4) M3(-3.5,-5) M4(-2.5,-5) M5(-1.5,-5) M6(-0.5,-5) M7(0.5,-5) M8(1.5,-5) M9(2.5,-5) M10(3.5,-5) N3(-3.5,-6) N4(-2.5,-6) N5(-1.5,-6) N6(-0.5,-6) N7(0.5,-6) N8(1.5,-6) N9(2.5,-6) N10(3.5,-6)
  rect 1.6x1.6 smd: A12(5,5.5) N1(-5,-5.5) N12(5,-5.5)
  Top region: -5.8,6.3 -5.8,4.7 -4.5,4.7 -4.2,5 -4.2,6.3
  silkscreen extent -6.25,-7.5 6.25,7.5
LS-1608 [mil]
  rect 32x32 smd: 1(-30,0) 2(30,0)
  silkscreen extent -55,-25 55,25
LS-2012 [mil]
  rect 55x55 smd: 1(-42.5,0) 2(42.5,0)
  silkscreen extent -80,-40 80,40
PH-2PSM [mil]
  rect 60x60 hole 39.37: 1(0,50)
  round 60 hole 39.37: 2(0,-50)
  silkscreen extent -80,-100 50,100
PowerDI123 [mm]
  rect 1.2x1.25 smd: 1(1.85,0)
  rect 2.4x1.25 smd: 2(-1.225,0)
  silkscreen extent -1.45,-0.97 1.55,0.98
QFN48_6x6 [mm]
  rrect0% 0.8x0.22 smd: 1(-3,2.2) 2(-3,1.8) 3(-3,1.4) 4(-3,1) 5(-3,0.6) 6(-3,0.2) 7(-3,-0.2) 8(-3,-0.6) 9(-3,-1) 10(-3,-1.4) 11(-3,-1.8) 12(-3,-2.2) 25(3,-2.2) 26(3,-1.8) 27(3,-1.4) 28(3,-1) 29(3,-0.6) 30(3,-0.2) 31(3,0.2) 32(3,0.6) 33(3,1) 34(3,1.4) 35(3,1.8) 36(3,2.2)
  rrect0% 0.22x0.8 smd: 13(-2.2,-3) 14(-1.8,-3) 15(-1.4,-3) 16(-1,-3) 17(-0.6,-3) 18(-0.2,-3) 19(0.2,-3) 20(0.6,-3) 21(1,-3) 22(1.4,-3) 23(1.8,-3) 24(2.2,-3) 37(2.2,3) 38(1.8,3) 39(1.4,3) 40(1,3) 41(0.6,3) 42(0.2,3) 43(-0.2,3) 44(-0.6,3) 45(-1,3) 46(-1.4,3) 47(-1.8,3) 48(-2.2,3)
  rect 4.3x4.3 smd: M1(0,0)
  silkscreen extent -3.22,-3 3,3.22
RP-4_1005 [mm]
  rect 0.406x0.55 smd: 1(-0.8,0.525) 2(-0.8,-0.525) 7(0.8,0.525) 8(0.8,-0.525)
  rect 0.305x0.55 smd: 3(-0.25,0.525) 4(-0.25,-0.525) 5(0.25,0.525) 6(0.25,-0.525)
  silkscreen extent -1.2,-0.6 1.2,0.6
RS-1005 [mm]
  rect 0.5x0.6 smd: 1(-0.45,0) 2(0.45,0)
  silkscreen extent -0.89,-0.51 0.89,0.51
RS-1608 [mil]
  rect 35x40 smd: 1(-31.5,0) 2(31.5,0)
  silkscreen extent -60,-30 60,30
SOD-106 [mm]
  rrect0% 2x2 smd: 1(-2.2,0) 2(2.2,0)
  silkscreen extent -2.3,-1.45 2.7,1.45
SOD-523 [mm]
  rect 0.6x0.7 smd: 1(0.71,0) 2(-0.71,0)
  silkscreen extent -0.8,-0.55 0.8,0.55
SOIC-8 [mil]
  rect 24x80 smd: 1(-76.34,-109.45)
  oval 24x80 smd: 2(-26.34,-109.45) 3(23.66,-109.45) 4(73.66,-109.45) 5(73.66,110.55) 6(23.66,110.55) 7(-26.34,110.55) 8(-76.34,110.55)
  silkscreen extent -101,-49 99,51
SOT23-6 [mm]
  rect 0.508x1.27 smd: 1(0.95,1.3) 2(0,1.3) 3(-0.95,1.3) 4(-0.95,-1.3) 5(0,-1.3) 6(0.95,-1.3)
  silkscreen extent -1.52,-0.89 1.52,2.4
SOT-23 [mil]
  rect 42x32 smd: 1(-45.45,37.75) 2(-45.45,-37.35) 3(44.85,0.2)
  silkscreen extent -20,-60 30,60
SOT-23-5P [mm]
  rect 0.5x1.1 smd: 1(-0.95,-1.35) 2(0,-1.35) 3(0.95,-1.35) 4(0.95,1.35) 5(-0.95,1.35)
  silkscreen extent -1.45,-2.65 1.45,0.6
SWS-CTT-1131U [mm]
  rect 2x1.2 smd: 1(-3,0) 2(3,0)
  silkscreen extent -3,-1.8 3,1.8
SX-32 [mm]
  rect 1.4x1.2 smd: 1(1.1,0.75) 2(-1.1,0.75) 3(-1.1,-0.75) 4(1.1,-0.75)
  silkscreen extent -2,-1.5 2,2
TP_0.8_SMD [mm]
  round 0.8 smd: 1(0,0)
  silkscreen extent -0.56,-0.56 0.56,0.56
TP_HEADER_6 [mm]
  rect 0.8x1.6 smd: 1(-3.125,0) 2(-1.875,0) 3(-0.625,0) 4(0.625,0) 5(1.875,0) 6(3.125,0)
TRC41604NL [mm]
  rect 0.76x1.52 smd: 1(-4.436,-4.445) 2(-3.168,-4.445) 3(-1.898,-4.445) 6(1.912,-4.445) 7(3.182,-4.445) 8(4.452,-4.445) 9(4.438,4.445) 10(3.168,4.445) 11(1.898,4.445) 14(-1.912,4.445) 15(-3.182,4.445) 16(-4.452,4.445)
  silkscreen extent -6.35,-3.56 6.35,3.56
TSSOP8-M [mm]
  rect 0.4x1.5 smd: 1(-0.975,-2.15) 2(-0.325,-2.15) 3(0.325,-2.15) 4(0.975,-2.15) 5(0.975,2.15) 6(0.325,2.15) 7(-0.325,2.15) 8(-0.975,2.15)
  silkscreen extent -1.5,-2.88 1.5,1.1
UTQFN-1.8】1.8-12L [mm]
  rect 0.75x0.2 smd: 1(-0.9,0.2) 2(-0.9,-0.2) 7(0.9,-0.2) 8(0.9,0.2)
  rect 0.2x0.75 smd: 3(-0.6,-0.9) 4(-0.2,-0.9) 5(0.2,-0.9) 6(0.6,-0.9) 9(0.6,0.9) 10(0.2,0.9) 11(-0.2,0.9) 12(-0.6,0.9)
  silkscreen extent -1.3,-0.9 0.9,0.9
VA-2.2 [mm]
  rrect100% 4x4 hole 2.2: 1(0,0)
XTS-MC-146 [mm]
  rect 1.4x0.6 smd: 1(-3.15,-0.42) 2(3.15,-0.42) 3(3.15,0.42) 4(-3.15,0.42)
  silkscreen extent -4.5,-0.9 4,0.9

## Via types
v1: diameter 0.5, hole 0.25, Top to Bottom, tented both sides, 352 vias
v2: diameter 0.5, hole 0.25, Top to Bottom, 35 vias

## Nets (pads, with @x,y where several pads share a name; then routed paths per layer and width w, separated by ;. In a path a pad name is that pad's centre, name@x,y a point inside that pad or via, vN(x,y) a via of type N, cw(c..) or ccw(c..) an arc to the next point about the centre after c; other vN are vias at no path point)
1.8VCORE: J2.14 J2.16 J2.18 TP2.1 | length 3.3
  Top w0.2: v1(-29.331,-8.75) J2.16@-28.17,-8.75 ; J2.14@-28.17,-9.25 J2.16@-28.17,-8.75 ; J2.18@-28.17,-8.25 J2.16@-28.17,-8.75
  Bottom w0.2: v1(-29.331,-8.75) TP2.1@-28.17,-8.75
1V2: BC25.2 BC30.2 BC31.2 BC32.2 BC33.2 BC34.2 BC35.2 BC36.2 U11.5 U17.D4 U17.E4 U17.E9 U17.F4 U17.F9 U17.F12 U17.G9 U17.H12 U17.J4 U17.K4 U17.K12 U17.L12 U17.N3 | length 22.6
  Top w0.2: v1(-6.667,-2) -6.417,-1.75 BC34.2@-6.1,-1.75 ; v1(-2.5,6) -2.4,5.9 BC31.2@-2.4,5.45 ; BC30.2@-2.3,-3.25 -2.05,-3 v1(-1.5,-3) ; v1(-1.5,6) -1.1,5.6 BC36.2@-1.1,5.45 ; -0.65,7.85 U11.5@-0.65,8.95 U11.5@-0.55,8.85 ; v1(-0.2,7.877) -0.027,8.05 BC25.2@0.7,8.05 ; v1(0.5,2) BC32.2@0.5,2.438 ; BC33.2@0.5,5.45 v1(0.5,6) ; BC35.2@2.5,-2.538 v1(2.5,-2)
  Top w0.4: v1(0.5,-2) v1(2.5,-2)
  INT1 w0.4: v1(-6.667,-2) -5.8,-2 ; -0.5,-2 v1(0.5,-2) ; 0.5,2.512 v1(0.5,2) v1(1.5,2)
  Bottom w0.2: v1(-6.667,-2) -6.667,-2.833 U17.N3@-6,-3.5 ; U17.L12@-4,5.5 U17.K12@-3,5.5 v1(-2.5,6) ; v1(-3.5,-3) U17.K4@-3,-2.5 ; U17.J4@-2,-2.5 v1(-1.5,-3) ; v1(-1.5,6) U17.H12@-1,5.5 ; U17.G9@0,2.5 v1(0.5,2) U17.F9@1,2.5 ; v1(0.5,-2) U17.F4@1,-2.5 ; v1(0.5,6) U17.F12@1,5.5 ; v1(1.5,2) U17.E9@2,2.5 ; U17.E4@2,-2.5 v1(2.5,-2) U17.D4@3,-2.5
  other v1: -0.977,7.071 -0.17,7.095 -1.001,7.877
1V8: BC18.2 BC24.2 BC37.2 BC38.2 BC39.2 BC40.2 FB8.1 OSC1.4 R19.1 R53.1 R54.1 R56.2 U17.E1 U17.J6 U17.J7 U17.K6 U17.K7 | length 22.2
  Top w0.2: BC18.2@-8.85,-3.3 OSC1.4@-7.45,-3.3 ; OSC1.4@-7.6,-3.15 v1(-7.6,-2.2) ; BC38.2@-1.762,0 v1(-1.143,0) R53.1@0.05,0 R54.1@0.05,-1.2 -0.1,-1.35 -0.1,-2.85 R56.2@0.05,-3 ; v1(1.502,-6.002) 1.805,-5.7 R19.1@2.05,-5.7 ; FB8.1@2.8,8.538 2.8,7.25 BC24.2@2.85,7.2
  Top w0.3: BC40.2@-3.15,-1 -3.15,-0.65 v1(-2.5,0) -2.7,0.2 BC37.2@-3.15,0.2 ; BC39.2@-3.15,1.4 -2.75,1 v1(-2.5,1)
  GND w0.3: v1(-7.6,-2.2) -7.6,-1.9 -6.2,-0.5 -4.3,-0.5 -3.8,0 v1(-2.5,0)
  Bottom w0.2: U17.K6@-3,-0.5 v1(-2.5,0) ; U17.K7@-3,0.5 v1(-2.5,1) ; U17.J6@-2,-0.5 -1.5,0 v1(-1.143,0) ; U17.J7@-2,0.5 v1(-1.5,1) ; v1(1.502,-6.002) U17.E1@2.002,-5.502
  other v1: 2,6.8 2,7.6
1V8_IO67: J1.68
1V8_IO68: J1.70
1V8_IO72: J1.72
1V8_IO73: J1.74
1V8_IO74: J1.76
1V8_IO82: J1.66
1V8_IO92: J2.59
1V8_IO93: J2.61
1V8_IO94: J2.51
1V8_IO95: J2.53
1V8_IO96: J2.57
1V8_IO104: J2.30
1V8_IO105: J2.32
1V8_IO106: J2.26
1V8_IO107: J2.28
1V8_IO118: J2.19
1V8_IO119: J2.21
3.3VCORE: J2.2 J2.4 TP1.1 | length 2.9
  Top w0.2: v1(-29.331,-11.75) J2.4@-28.17,-11.75 J2.2@-28.17,-12.25
  Top w0.4: v1(-29.331,-11.75) v1@-29.306,-11.775
  Bottom w0.2: v1(-29.331,-11.75) TP1.1@-28.17,-11.75
3V3: BC19.1 BC20.2 BC41.2 BC42.2 BC43.2 BC44.2 BC45.2 BC46.2 BC47.2 BC48.2 FB13.2 U17.A4 U17.A7 U17.A8 U17.A9 U17.A10 | length 15.6
  Top w0.2: BC42.2@5.95,3.6 5.95,3.55 v1(6.5,3) ; BC43.2@5.988,2.4 6.5,2.913 v1(6.5,3) ; BC43.2@6.062,2.4 6.462,2 v1(6.5,2) 6.95,2 BC46.2@7.05,1.9 ; BC41.2@6.25,1.2 6.657,1.2 v1(6.857,1) ; BC20.2@7.05,3.1 6.95,3 v1(6.5,3) ; BC48.2@7.1,-2.6 v1(6.5,-2) BC45.2@7.1,-1.4
  Top w0.4: BC19.1@7.966,7.727 BC19.1@8.427,7.727 ; BC19.1@8.1,7.4 BC19.1@8.427,7.727 ; FB13.2@13,8.638 11.209,8.638 10.298,7.727 BC19.1@8.427,7.727
  Bottom w0.2: U17.A4@6,-2.5 v1(6.5,-2) ; U17.A7@6,0.5 6.5,1 v1(6.857,1) ; U17.A8@6,1.5 v1(6.5,2) ; U17.A9@6,2.5 v1(6.5,3) U17.A10@6,3.5
  other v1: 7.6,5.927 8.4,5.927 7.6,6.727 8.4,6.727
3V3_IO114: J1.11
3V3_IO115: J1.9
3V3_IO124: J2.9
3V3_IO125: J2.7
3V3_IO126: J2.5
3V3_IO127: J2.3
+1.8V: BC1.1 BC29.2 C28.1 C38.1 FB8.2 J6.1 L6.2 R6.2 R8.2 R9.2 R10.2 R41.2 R58.2 U19.2 | length 78.8
  Top w0.3: v1(13.5,-15.523) R9.2@14.127,-15.523 ; BC1.1@14.127,-16.55 R9.2@14.127,-15.523 ; J6.1@15.89,-17.7 15.89,-15.552 ; R8.2@16.527,-15.523 R9.2@14.127,-15.523
  Top w0.4: v1(4,10) 4,11.3 4.2,11.5 BC29.2@4.2,11.7 ; BC29.2@4,11.7 4,13.15 v1(5.566,14.716) ; R8.2@16.469,-15.498 R8.2@16.517,-15.45 ; v2(17.9,-12.1) R41.2@18.55,-12.1
  Top w0.6: FB8.2@2.962,10 v1(4,10)
  Top w1: v1(4,10) v1(4.7,10)
  INT1 w0.3: v1(13.5,-15.523) 13.5,-13.7 13.9,-13.3 17.9,-13.3 ; v2(17.9,-12.1) 17.9,-13.3 ; v1(22.993,-8.97) 22.993,-10.603 20.296,-13.3 17.9,-13.3
  GND w0.4: v1(4.7,10) 5,10 7.2,7.8 v1(18.9,7.8)
  GND w1: v1(4,10) v1(4.7,10)
  Bottom w0.2: U19.2@22.8,-9.8 22.8,-9.164
  Bottom w0.254: 25.1,2.1 R6.2@26.85,2.1
  Bottom w0.4: L6.2@3.4,10.62 5.32,10.62 ; L6.2@3.48,10.9 C38.1@5.4,10.9 ; 4.2,10.9 4.7,10.4 ; v1(5.566,14.716) C28.1@5.566,15.483 R58.2@5.566,16.703 ; v1(18.9,7.8) 22.83,7.8 25.1,5.53 25.1,-7.6 23.73,-8.97 v1(22.993,-8.97)
  Bottom w1: v1(4,10) v1(4.7,10) 5.32,10.62
+3.3V: BC3.2 BC21.2 BC27.2 C6.1 C7.1 C35.1 C36.1 FB1.1 FB2.1 FB13.1 J5.1 J10.4 L2.2 R13.2 R44.1 R46.2 R66.2 RP1.2 RP1.4 RP1.6 RP1.8 RP2.2 RP2.4 RP2.6 RP2.8 TVS1.1 U16.8 U19.1 | length 140.8
  Top w0.4: U16.8@-23.05,-16.2 -23.05,-17.2 BC27.2@-23,-17.25 v2(-22,-17.25) ; v1(-18.725,-8.675) R66.2@-18.725,-8 ; v2(-11.2,6.9) -10.563,6.263 J10.4@-10.563,4.412 ; FB13.1@13.15,10.2 v1@13.15,11.05 ; v1(13.2,14.5) 13.2,12.238 13.638,11.8 FB1.1@14.438,11.8 ; FB13.1@13.212,10.262 BC21.2@14.5,10.262
  INT1 w0.4: v1(-18.725,-8.675) -19.775,-8.675 -22,-10.9 v2(-22,-17.25) -14.05,-17.25 -12.8,-16 -6.1,-16 -5.3,-15.2 4,-15.2 4.6,-15.8 7.9,-15.8 v2(11.7,-12) ; 12.8,11.4 v1(13,11.2)
  INT1 w0.6: v2(-11.2,6.9) -6.7,11.4 12.8,11.4
  INT1 w0.8: v2(11.7,-12) 10.7,-11 10.7,-6.3 13.9,-3.1 13.9,7.738 13,8.638 v1(13,11.2)
  Bottom w0.2: 17.051,-12.9 17.051,-11.978 17.944,-11.084 R46.2@18.55,-11.084 ; R46.2@18.566,-11.068 R44.1@18.566,-9.911 18.566,-9.334 18.932,-8.968 22.087,-8.968 22.4,-9.281 U19.1@22.4,-9.8
  Bottom w0.3: RP2.8@-19.6,4.675 -14.525,4.675 -14,5.2 C36.1@-14,7.5
  Bottom w0.4: C36.1@-13.95,7.55 C35.1@-11.2,7.55 v2(-11.2,6.9) ; FB2.1@11.7,-10.962 v2(11.7,-12) 12.6,-12.9 17.051,-12.9 17.625,-13.474 J5.1@17.625,-14.058 ; v1(13.2,14.5) C6.1@13.2,15.46 ; C6.1@13.223,15.46 R13.2@13.223,16.723
  other v1: 12.5,12
+5.0V: BC2.2 BC26.2 BC28.2 C4.1 C5.1 C32.1 J1.55 J1.57 J1.59 J1.61 L1.2 L5.2 R1.2 R2.2 R12.1 U1.1 U1.4 U11.1 U11.3 U12.1 U18.1 U18.4 | length 79.9
  Top w0.2: BC28.2@0.5,16.95 v1(0.5,17.85) ; BC2.2@8.173,16.923 v1(8.173,17.823) ; R2.2@9.15,13.6 9.7,13.6 10.823,14.723 v1(10.823,16.48)
  Top w0.254: v1(-17.865,-5.75) U12.1@-16.9,-5.75 ; U11.3@-2.55,11.65 -2.55,12.954 ; -2.504,13 -2,13 ; R1.2@16.1,14.95 v1(16.1,15.7)
  Top w0.4: C32.1@-18.74,-5.387 -18.228,-5.387 v1(-17.865,-5.75) ; v1(-2,16.8) -2,13 -0.8,13 -0.65,12.85 U11.1@-0.65,11.65 ; -0.396,11.7 BC26.2@0.45,11.7
  Top w0.6: v1(-19.895,-10.1) L5.2@-18.879,-10.1
  INT1 w0.254: -17.865,-7 v1(-17.865,-5.75)
  INT1 w0.3: v2(-26.4,-7) -17.965,-7 ; v1(-19.895,-10.1) -18.7,-10.1 -17.865,-9.265 -17.865,-7
  INT1 w0.6: v1(-22.7,9.4) -14.9,17.2 -5.1,17.2
  Bottom w0.2: v1(0.5,17.85) U18.4@1.2,17.85 ; U18.1@3.15,15.43 v1(3.15,16.48) ; v1(8.173,17.823) U1.4@8.873,17.823 ; U1.1@10.823,15.43 v1(10.823,16.48)
  Bottom w0.3: v2(-26.4,-7) -28.17,-5.23 -28.17,8.03 -26.15,10.05 R12.1@-22.7,10.05 v1(-22.7,9.4)
  other v1: 22.435,1.53 23.12,1.53 22.435,2.28 23.12,2.28 -5.1,16.8 -4,16.8 -3,16.8 -5.1,17.7 -4,17.7 -3,17.7 -2,17.7
+12V: C8.1 C11.1 D2.2 R11.1 U13.2 | length 49.4
  Bottom w0.2: R11.1@-19.2,17.564 -19.2,15.679 -18.367,14.846
  Bottom w0.6: U13.2@-16.482,14.846 -18.367,14.846 -18.367,11.133 -24.57,4.93 -24.57,-9.93 -22.9,-11.6 -13,-11.6 -12.4,-12.2 D2.2@-10.9,-12.2 ; C11.1@-10.8,-14.7 D2.2@-10.8,-12.2
ADCOUT_C: J2.60
AVDD33: BC7.1 BC8.1 BC9.1 FB2.2 R49.1 U4.1 U4.12 | length 14.6
  Top w0.2: v1(13.318,-8.374) 13.861,-8.374 U4.1@13.868,-8.382 ; U4.12@18.268,-8.149 v1(18.818,-8.149)
  INT1 w0.4: v1(13.318,-8.374) 15.643,-8.374 15.868,-8.149 v1(18.818,-8.149)
  Bottom w0.2: v1(18.818,-8.149) BC8.1@18.818,-7.499
  Bottom w0.4: R49.1@8.75,-11.3 8.75,-10.85 10.15,-9.45 BC7.1@13.3,-9.45 13.318,-9.433 v1(13.318,-8.374) BC9.1@13.875,-8.374
AVDDL_1V2: BC14.1 BC15.1 BC16.1 FB4.2 U4.4 U4.9 U4.47 | length 14.3
  Top w0.2: v1(12,-7.249) 12.3,-6.949 U4.47@13.068,-6.949 ; v1(14.9,-9.449) 15.068,-9.282 U4.4@15.068,-8.149 ; v1(17.068,-9.268) U4.9@17.068,-8.149
  INT1 w0.4: v1(12,-7.249) 12,-8.76 12.69,-9.449 v1(14.9,-9.449) 15.919,-9.449 16.1,-9.268 v1(17.068,-9.268)
  Bottom w0.2: v1(17.068,-9.268) BC16.1@17.068,-8.599
  Bottom w0.3: v1(14.9,-9.449) 14.9,-9.217 15.068,-9.049 BC15.1@15.068,-8.399
  Bottom w0.4: v1(12,-7.249) 12,-6.749 12,-5.387 FB4.2@12.038,-5.349
BCLK_C: J2.63
BOOT_CTL0: J1.79
BOOT_CTL1: D3.2 J1.77 J4.2 | length 17.5
  Top w0.2: J4.2@20.43,17 22.304,15.126 23.756,15.126 26.1,12.782 26.1,7.1 25.75,6.75 J1.77@24.645,6.75
  Bottom w0.2: D3.2@18.054,15.951 19.351,15.951 20.4,17 J4.2@20.43,17
BT_RST_IN: J1.50
BT_UART_RX: J2.22
BT_UART_TX: J2.24
BT_WAKE_IN: J1.62
BT_WAKE_OUT: J1.64
CFG_LED1: R3.2 R50.1 U4.36 | length 8.4
  Top w0.2: U4.36@13.868,-2.149 13.868,3.132 13.2,3.8 R3.2@13.2,4.75 R50.1@14.4,4.75
CFG_LED2: R5.2 R48.2 U4.37 | length 11.1
  Top w0.2: R48.2@10.506,4.75 R5.2@11.7,4.75 v2(11.7,4) v2@11.7,3.885 ; v2(12,-2.949) U4.37@13.068,-2.949
  INT1 w0.2: v2(11.7,4) 11.7,2.85 13.1,1.45 13.1,-1.849 v2(12,-2.949)
DACIN_C: J2.58
DRIVE_WS2812_3V3: J2.13 R66.1 R67.2 | length 6.8
  Top w0.2: J2.13@-24.57,-9.25 v1@-23.4,-9.25 ; v1(-20.2,-8) R66.1@-19.625,-8 R67.2@-19.625,-6.7
  INT1 w0.2: v1(-23.4,-9.258) -22.497,-9.258 -21.24,-8 v1(-20.2,-8)
DVDD33: BC4.1 BC5.1 BC6.1 FB1.2 R48.1 R50.2 U4.30 U4.31 | length 23.1
  Top w0.4: R48.1@10.5,5.65 10.5,6.2 10.9,6.6 v1(16.063,6.6) ; BC6.1@16,10.2 FB1.2@16,11.8 ; v1(16.063,9.337) BC6.1@16.063,10.137
  Top w0.5: R50.2@14.4,5.65 14.4,6.5
  Top w0.6: 16.068,-2.249 v1@16.068,-1.336
  INT1 w0.5: v1(16.063,-1.336) v1(16.063,6.6) v1(16.063,9.337)
  Bottom w0.4: BC5.1@15.5,-2.099 15.5,-1.899 v1(16.063,-1.336) 16.663,-1.936 BC4.1@16.663,-2.103
DVDD_RGMII: BC10.1 BC11.1 R27.1 R28.1 R30.1 R42.2 U4.29 | length 20
  Top w0.2: U4.29@16.668,-2.149 16.668,-0.5
  Top w0.4: 16.668,-0.5 16.668,0.327 17.367,1.027 BC11.1@20.381,1.027 ; BC11.1@20.399,1.045 v1(21.3,0.143)
  Bottom w0.2: BC10.1@21.3,1.25 21.3,0.5 v1(21.3,0.143) 21.593,-0.15 21.95,-0.15 R42.2@22.4,-0.15 R30.1@23.6,-0.15 24.12,-0.15 24.37,-0.4 24.37,-5.23 23.45,-6.15 R28.1@23.45,-6.7 R27.1@23.45,-7.9
DVDDL: BC12.1 FB3.2 U4.22 | length 6.7
  Top w0.2: U4.22@19.068,-3.749 19.97,-3.749 v1(20.164,-3.555)
  Bottom w0.4: FB3.2@17.4,0.438 17.4,-1.149 19.25,-2.999 BC12.1@19.25,-3.549 ; BC12.1@19.384,-3.568 19.384,-3.539 v1@20.153,-3.539
DVP_D0: J1.91
DVP_D1: J1.94
DVP_D2: J1.93
DVP_D3: J1.82
DVP_D4: J1.86
DVP_D5: J1.96
DVP_D6: J1.95
DVP_D7: J1.84
DVP_D8: J1.98
DVP_D9: J1.97
DVP_D10: J1.100
DVP_D11: J1.88
DVP_D12: J1.92
DVP_D13: J1.90
DVP_D14: J1.99
DVP_D15: J1.81
DVP_DEN: J1.87
DVP_HREF: J1.85
DVP_PCLK: J1.89
DVP_VSYNC: J1.83
EPHY_TRCT: C20.1 R49.2 T1.2 T1.7 | length 21.6
  Top w0.2: C20.1@-7.05,-9.3 -7.05,-8.416 -5.452,-6.818 -3.182,-6.818 T1.7@-3.182,-8.355 ; -3.2,-6.8 -1.3,-6.8 -0.8,-7.3 0.5,-7.3 0.984,-6.816 2.816,-6.816 3.168,-7.168 3.168,-8.355 v1(3.168,-9.468)
  Bottom w0.2: v1@3.154,-9.482 v1(3.168,-9.468) 4.168,-9.468 6,-11.3 R49.2@7.85,-11.3
ETH_INTB: J1.28 U19.4 | length 10.4
  Top w0.2: J1.28@28.27,-5.75 v1(29.5,-5.75)
  Bottom w0.2: U19.4@23.5,-10.5 26.8,-10.5 28.3,-9 28.3,-6.95 v1(29.5,-5.75)
ETH_RST: J1.18 U19.3 | length 6.3
  Top w0.2: v1(27.1,-8.25) J1.18@28.27,-8.25
  Bottom w0.2: U19.3@23.5,-10.1 26.5,-10.1 27.1,-9.5 v1(27.1,-8.25)
FD_SW: C2.1 R7.2 SW1.1 | length 3.1
  Bottom w0.2: SW1.1@26.4,6.821 C2.1@26.4,5.05 R7.2@27.7,5.05
FS_C: J2.62